# Allegro board TKA13_DEV_REVB.brd
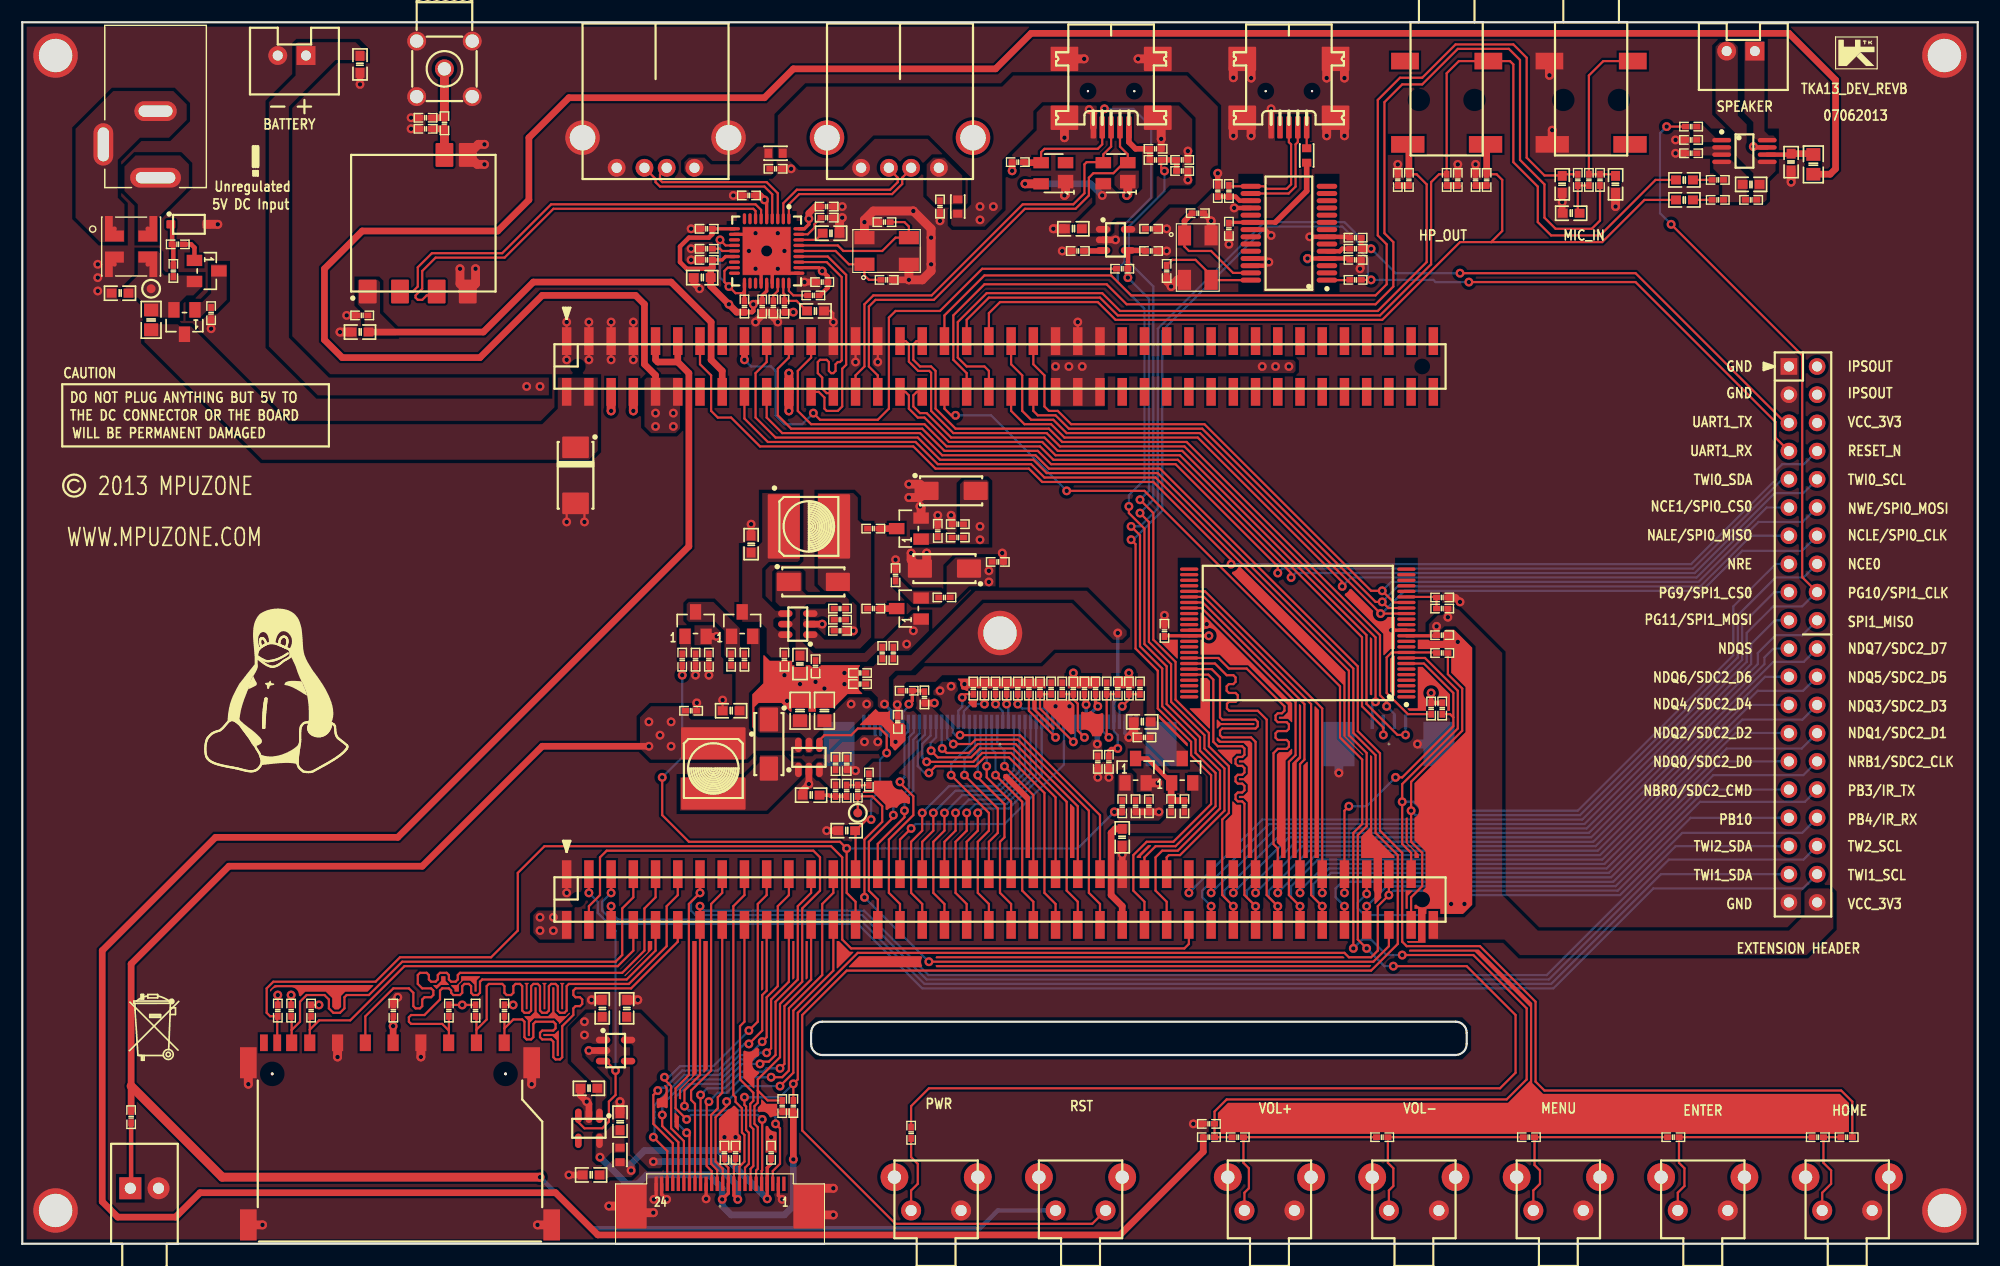
[diagram p0: board, top side]
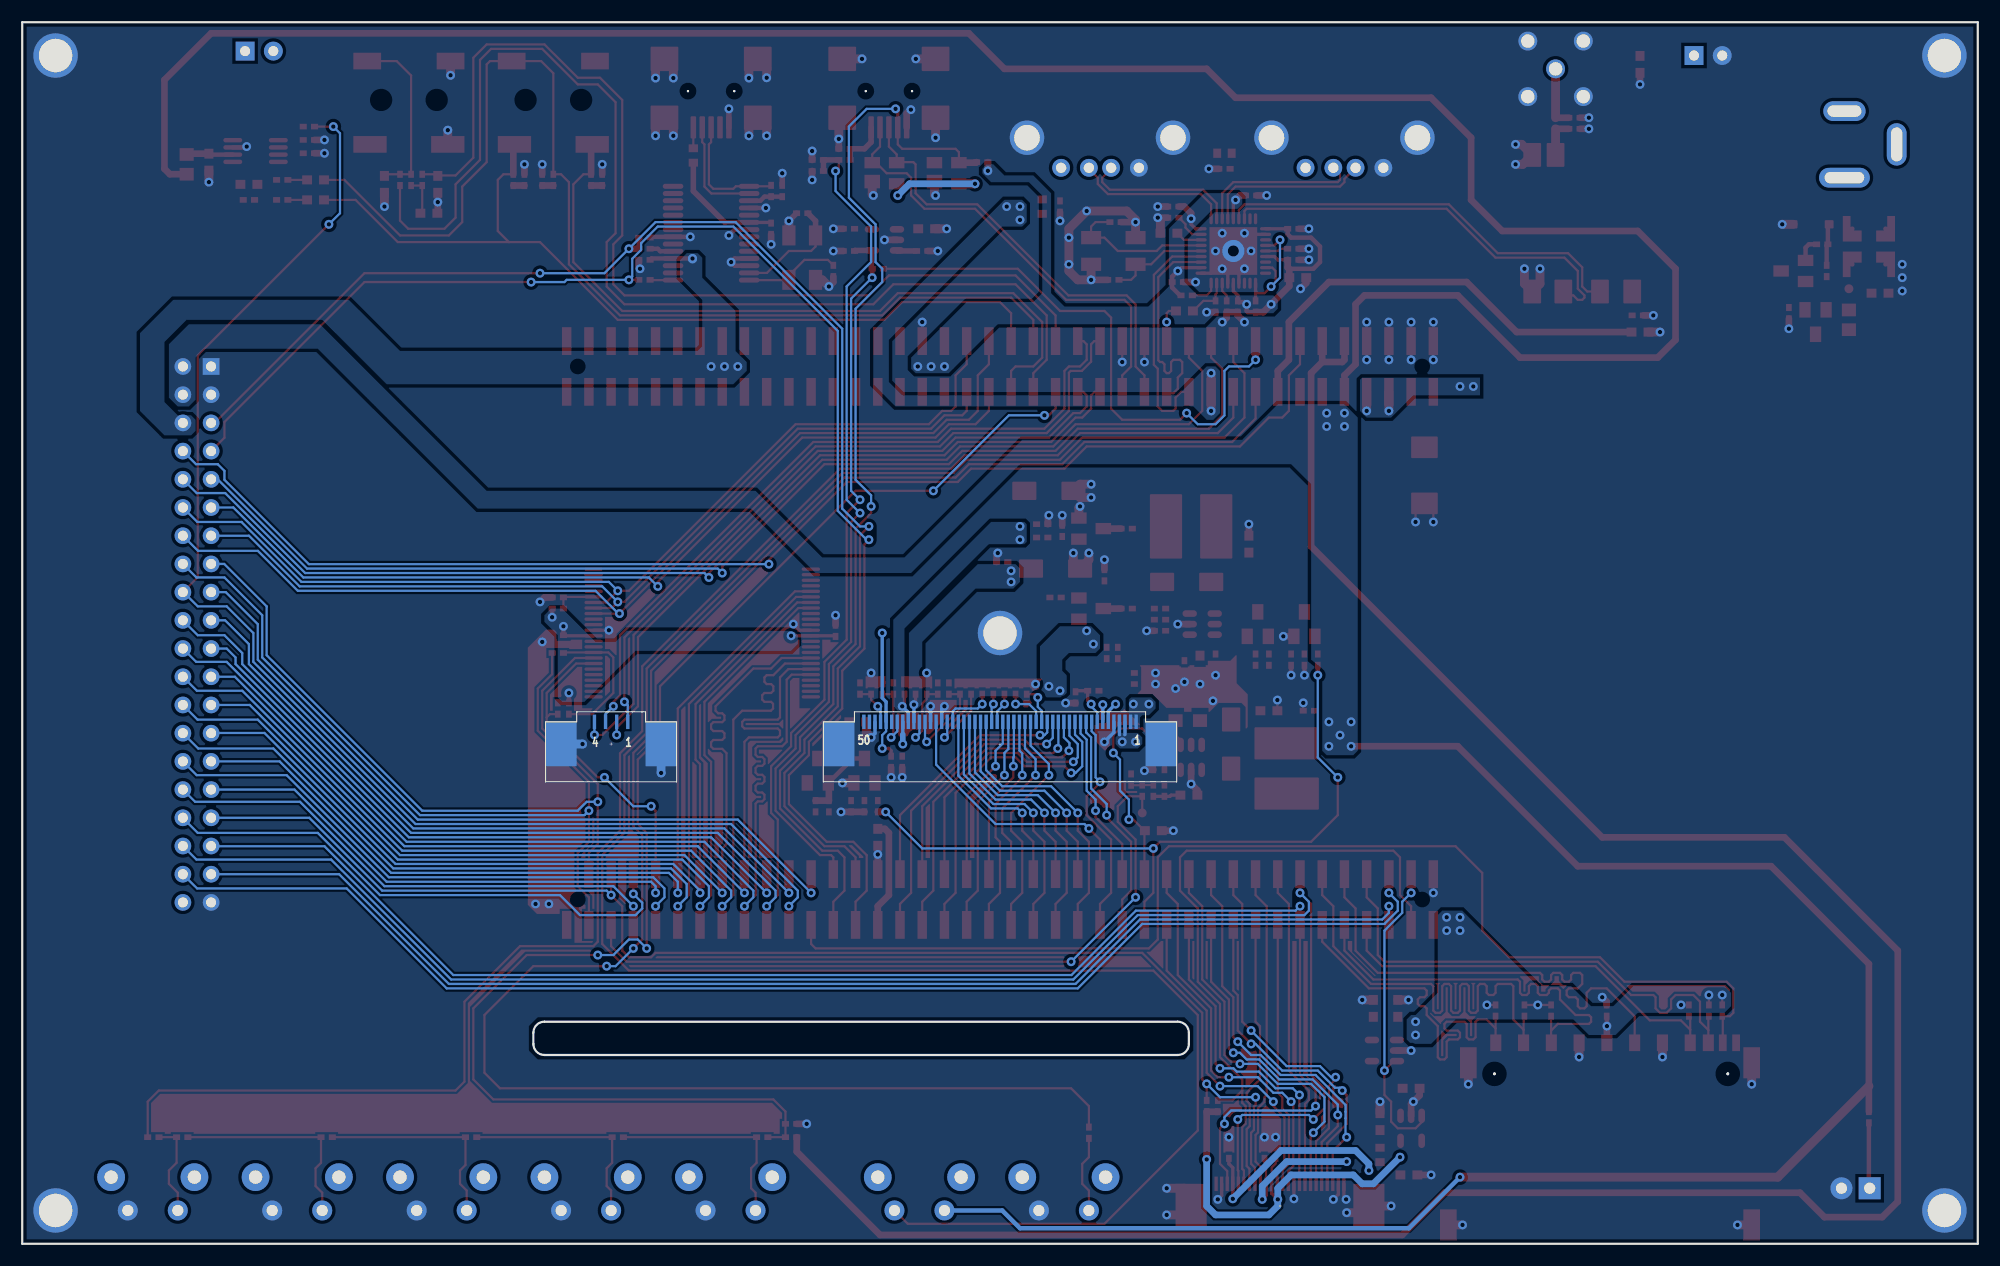
[diagram p1: board, bottom side, seen from below]

Outline 176 x 110 mm; copper layers: TOP, BOTTOM. Coordinates in mm from the lower left corner of the outline.
Outline path: 0,110 176,110 176,0 0,0 0,110 ; 71,19 arc(71.29,19.71) 72,20 129,20 arc(129.71,19.71) 130,19 130,18 arc(129.71,17.29) 129,17 72,17 arc(71.29,17.29) 71,18 71,19

## Design rules (mm)
net group BUS_NAND_NDQ: nets NDQ0/SDC2_D0 NDQ1/SDC2_D1 NDQ2/SDC2_D2 NDQ3/SDC2_D3 NDQ4/SDC2_D4 NDQ5/SDC2_D5 NDQ6/SDC2_D6 NDQ7/SDC2_D7

## Placement (name value [footprint] x y rotation side)
B1  BLM18PG121SH1  [0603_CC]  84.2 93.4 90 top
B2  BLM18PG121SH1  [0603_CC]  67.8 98.2 180 top
B3  BLM18PG121SH1  [0603_CC]  53.8 8 270 top
B4  BLM18PG121SH1  [0603_CC]  115.6 98 90 top
C1  220uF  [CAP220UF]  49.8 69.2 270 top
C2  10u  [0603]  8.8 85.6 180 top
C3  10u  [0603]  30.4 106.2 270 top
C4  10u  [0603]  61.2 87 180 top
C5  100n  [0402]  65.4 94.4 180 top
C6  100n  [0402]  61.6 91.4 180 top
C7  100n  [0402]  61.6 88.6 180 top
C8  100n  [0402]  66.6 84.4 270 top
C9  100n  [0402]  72 86.6 180 top
C10  100n  [0402]  72.4 93.4 0 top
C11  100n  [0402]  82.6 93.4 270 top
C12  4.7u  [0603]  71.4 84 0 top
C13  100n  [0402]  67.8 96.8 0 top
C14  4.7u  [0603]  72.8 91 0 top
C15  100n  [0402]  61.6 89.6 180 top
C16  33p  [0402]  77.6 92 180 top
C17  33p  [0402]  77.8 86.8 0 top
C18  100n  [0402]  102 98.6 0 top
C19  100n  [0402]  101.6 91.4 0 top
C20  10u  [0603]  94.6 91.4 180 top
C21  100n  [0402]  104.4 96.6 0 top
C22  100n  [0402]  33.4 21 90 top
C23  100n  [0402]  102.8 55.2 90 top
C24  100n  [0402]  127.8 54.8 0 top
C25  100n  [0402]  127.8 58.2 0 top
C26  10u  [0603]  63.8 48 180 top
C27  100n  [0402]  60.2 48 0 top
C28  10u (50V)  [0805]  70 48 90 top
C29  100n (50V)  [0805]  72.2 48 90 top
C30  100n  [0402]  82.4 64.2 90 top
C31  100n  [0402]  76.6 64.4 0 top
C32  100n  [0402]  96.6 50 90 top
C33  4.7u  [0603]  71 40.4 180 top
C34  100n  [0402]  78.6 60.2 90 top
C35  100n  [0402]  95.6 50 90 top
C36  100n  [0402]  76.6 57.2 0 top
C37  100n  [0402]  103.4 39.4 90 top
C38  10u  [0603]  100.8 47 180 top
C39  100n  [0402]  78.8 47 270 top
C40  100n  [0402]  63.8 52.6 90 top
C41  10u  [0603]  70 52.2 270 top
C42  100n  [0402]  96.8 43.4 270 top
C43  10u  [0603]  99 36.6 270 top
C44  10u  [0603]  65.6 63 90 top
C45  100n  [0402]  68.6 52.6 270 top
C46  DNP  [0402]  73.6 56.2 180 top
C47  100n  [0402]  100.2 39.4 270 top
C48  100n  [0402]  60.6 52.6 270 top
C49  100n  [0402]  98.6 50 90 top
C50  100n  [0402]  97.8 43.4 270 top
C51  10u  [0603]  51 14 180 top
C52  100n  [0402]  63.2 8.2 90 top
C53  10u  [0603]  53.8 11 90 top
C54  100n  [0402]  67.4 8.2 90 top
C55  10u  [0603]  51.2 6.2 180 top
C56  10u  [0603]  52.2 21.2 90 top
C57  100n  [0402]  64.2 8.2 90 top
C58  10u  [0603]  54.4 21.2 90 top
C59  100n  [0402]  123.8 95.8 90 top
C60  100n  [0402]  129.2 95.8 90 top
C61  100n  [0402]  130.8 95.8 90 top
C62  100n  [0402]  142 95.8 90 top
C63  4.7u  [0603]  138.6 95.4 270 top
C64  4.7u  [0603]  139.4 92.8 180 top
C65  3300p  [0603]  143.4 95.4 270 top
C66  1u  [0402]  150.2 98.2 180 top
C67  10u  [0603]  159.2 97.4 270 top
C68  390n  [0603]  149.6 94 0 top
C69  390n  [0603]  149.6 95.8 0 top
C70  1n  [0603]  155.6 95.4 0 top
C71  10u  [0603]  30.4 82.1 180 top
C72  100n  [0402]  30.6 83.6 180 top
C73  (DNP)  [0402]  36.3 100.4 180 top
C74  (DNP)  [0402]  36.3 101.4 180 top
C75  33p  [0402]  103 87.6 270 top
C76  33p  [0402]  105.8 92.8 0 top
C77  100n  [0402]  120 88.6 0 top
C78  100n  [0402]  107.6 94.8 90 top
C79  100n  [0402]  108.6 91.4 270 top
C80  1n  [0402]  106.8 10.8 180 top
D1  MMSZ5231BT1G  [SOD123]  15 91.8 0 top
D2  SR05  [SOT_143]  98.4 96.4 90 top
D3  SR05  [SOT_143]  92.8 96.4 90 top
D4  -  [SS14]  67.2 45 270 top
D5  BAT54S  [SOT-23]  79.8 64.4 90 top
D6  IN4736-6V8  [SS14]  83.6 67.8 0 top
D7  BAT54S  [SOT-23]  79.8 57.2 90 top
D8  IN4744-15V  [SS14]  83 60.8 180 top
D9  -  [SS14]  71.2 59.6 0 top
HL1  HOLE  [HOLE-VIA]  3 3 0 top
HL2  HOLE  [HOLE-VIA]  173 3 0 top
HL3  HOLE  [HOLE-VIA]  173 107 0 top
HL4  HOLE  [HOLE-VIA]  3 107 0 top
HL5  HOLE  [HOLE-VIA]  88 55 0 top
J1  PWR  [CONN3-PWR-PJ102A]  12 96 90 top
J2  BAT  [CON2_MOD]  23 107 0 top
J3  CON40X2  [HDR200F-SMT-2X40-FLIP]  88 31 180 top
J4  CON40X2  [HDR200F-SMT-2X40-FLIP]  88 79 180 top
J5  USB_A  [EDAC-690-004]  79 99.6 180 top
J6  USB_A  [EDAC-690-004]  57 99.6 180 top
J7  USB_MB  [HIROSE-US60-MB-5ST]  98 109.8 180 top
J8  FFC_50  [TFT_LCD_50]  88 45 180 bottom
J9  FFC_4  [TFT_LCD_RT_4]  123 45 180 bottom
J10  FFC_24  [TFT_LCD_24]  62.8 3.4 0 top
J11  HP_OUT  [AUDIO_SMD_3P]  128.2 105 270 top
J12  HP_OUT  [AUDIO_SMD_3P]  141.2 105 270 top
J13  SPK  [CON2_MOD]  153.4 107.4 0 top
J14  CON_SMA  [SMA_RIGHT_ANGLE]  38 105.8 90 top
J15  USB_MB  [HIROSE-US60-MB-5ST]  114 109.8 180 top
J16  CON40A  [HDR254M-2X20]  159 79 270 top
L1  10uH  [INDUCTOR50X50]  62.2 42.8 270 top
L2  10uH  [INDUCTOR50X50]  70.8 64.6 0 top
L3  FBMH2012HM121-T  [0805]  161.2 97.2 90 top
LED1  PWR  [LED_RIGHT_ANGLE]  11 5 0 top
NOREF  -  []  4.8 68.4 0 top
NOREF#2  -  []  163.2 105.8 0 top
NOREF#3  -  []  14.4 19.6 0 top
NOREF#4  -  []  16.4 36.4 0 top
Q1  IRLML6401  [SOT-23]  14.6 83 180 top
Q2  MBT3906DW1T1  [SOT-23]  16.6 87.6 270 top
Q3  IRLML6401  [SOT-23]  104.4 42.6 0 top
Q4  IRLML6401  [SOT-23]  64.8 55.8 0 top
Q5  MMBT3904  [SOT-23]  100.2 42.6 0 top
Q6  MMBT3904  [SOT-23]  60.6 55.8 0 top
R1  0R (DNP)  [0805]  11.6 83.2 270 top
R2  2K7  [0402]  13.6 87.6 90 top
R3  10K  [0402]  14 90 0 top
R4  470K  [0402]  17 83.8 270 top
R5  1K  [0402]  9.8 11.4 270 top
R6  10K  [0402]  71.2 85.4 180 top
R7  10K  [0402]  68.6 84.4 90 top
R8  10K  [0402]  67.6 84.4 270 top
R9  10K  [0402]  65 84.4 90 top
R10  10K  [0402]  72.4 92.4 0 top
R11  47K  [0402]  102 97.6 0 top
R12  200K  [0402]  101.6 89.4 0 top
R13  6K8  [0402]  95 89.4 180 top
R14  100K  [0402]  104.4 97.6 0 top
R15  47K  [0402]  89.6 97.4 0 top
R16  0R  [0402]  99 87.8 180 top
R17  47K  [0402]  23 21 270 top
R18  47K  [0402]  24.2 21 270 top
R19  47K  [0402]  26 21 270 top
R20  47K  [0402]  38.4 21 270 top
R21  47K  [0402]  40.8 21 270 top
R22  47K  [0402]  43.4 21 270 top
R23  10K  [0402]  126.8 48.2 90 top
R24  10K  [0402]  127.8 48.2 90 top
R25  10K  [0402]  127.8 57.2 0 top
R26  4K7  [0603]  74.2 37.2 180 top
R27  2K2  [0402]  73.2 43.2 90 top
R28  2R2 1%  [0402]  74.2 43.2 270 top
R29  1K5  [0402]  84.2 63.6 0 top
R30  47K  [0402]  84.2 64.8 180 top
R31  4K7  [0402]  76.2 41.8 270 top
R32  220R  [0402]  75.2 40.8 90 top
R33  4K7  [0402]  74.2 40.8 270 top
R34  20K  [0402]  73.2 40.8 90 top
R35  22R  [0402]  85.6 50 270 top
R36  100K  [0402]  86.6 50 270 top
R37  1K5  [0402]  83 58.2 0 top
R38  47K  [0402]  87.8 61.4 0 top
R39  100K  [0402]  87.6 50 270 top
R40  100K  [0402]  88.6 50 270 top
R41  470K  [0402]  65 52.6 90 top
R42  100K  [0402]  89.6 50 270 top
R43  100K  [0402]  90.6 50 270 top
R44  470K  [0402]  104.6 39.4 90 top
R45  4K7  [0402]  101 45.6 180 top
R46  20K  [0402]  71.4 52 270 top
R47  51K 1%  [0402]  73.6 57.2 180 top
R48  100K  [0402]  99 39.4 90 top
R49  100K  [0402]  59.4 52.6 90 top
R50  470K  [0402]  101.4 39.4 270 top
R51  470K  [0402]  61.8 52.6 270 top
R52  1K 1%  [0402]  73.6 55.2 0 top
R53  10K  [0402]  97.6 50 270 top
R54  10K (DNP)  [0402]  92.6 50 270 top
R55  10K  [0402]  93.6 50 270 top
R56  10K  [0402]  100.6 50 270 top
R57  10K (DNP)  [0402]  79.6 49.8 0 top
R58  10K  [0402]  78.4 53.2 270 top
R59  2K2  [0402]  77.4 53.2 270 top
R60  10K  [0402]  91.6 50 90 top
R61  10K (DNP)  [0402]  94.6 50 90 top
R62  10K (DNP)  [0402]  99.6 50 90 top
R63  10K  [0402]  81.2 49.2 270 top
R64  2K2  [0402]  75.4 51.4 180 top
R65  2K2  [0402]  75.4 50.4 180 top
R66  10K  [0402]  69.4 12.4 90 top
R67  10K  [0402]  68.4 12.4 90 top
R68  22R  [0402]  124.8 95.8 270 top
R69  22R  [0402]  128.2 95.8 270 top
R70  22R  [0402]  131.8 95.8 270 top
R71  2K  [0402]  140 95.8 270 top
R72  4K3  [0402]  141 95.8 90 top
R73  10K  [0402]  150.2 100.6 0 top
R74  10K (DNP)  [0402]  150.2 99.4 180 top
R75  20K  [0402]  152.6 94 0 top
R76  33K  [0402]  155.6 94 0 top
R77  20K  [0402]  152.6 95.8 0 top
R78  0R  [0402]  38 100.9 90 top
R79  22R  [0402]  120 86.8 180 top
R80  22R  [0402]  120 89.6 180 top
R81  100K  [0402]  120 90.6 180 top
R82  1K5  [0402]  108.6 94.8 90 top
R83  1K  [0402]  80 10 270 top
R84  100K  [0402]  106.8 9.6 0 top
R85  6K8  [0402]  109.4 9.6 0 top
R86  8K2  [0402]  122.4 9.6 0 top
R87  10K  [0402]  135.6 9.6 0 top
R88  11K  [0402]  148.6 9.6 0 top
R89  13K  [0402]  161.6 9.6 0 top
R90  0R  [0402]  164.2 9.6 0 top
R91  0R  [0402]  127.8 53.2 0 top
S1  PWRON  [BUTTON_RST]  80 3 0 top
S2  RESET  [BUTTON_RST]  93 3 0 top
S3  VOL+  [BUTTON_RST]  110 3 0 top
S4  VOL-  [BUTTON_RST]  123 3 0 top
S5  MENU  [BUTTON_RST]  136 3 0 top
S6  ENTER  [BUTTON_RST]  149 3 0 top
S7  HOME  [BUTTON_RST]  162 3 0 top
TP1  5V_IN  [TP80]  11.6 86 0 top
TP2  PWM  [TP80]  75.2 38.8 0 top
U1  DLW5BTN501SQ2L  [DLW5BTN501SQ2]  9.8 89.8 270 top
U2  USB2513B-AEZG  [QFN50P600X600-36V1N]  67 89.4 270 top
U3  SY6280AAC  [SOT23-5]  98.4 90.4 270 top
U4  K9F2G08U0M  [TSOP48]  114.8 55 90 top
U5  SD_SOCKET  [SDCARD_SHORT]  34 9 0 top
U6  SY7201  [SSOT23-6]  70.8 43.8 0 top
U7  AP3019KTR  [SSOT23-6]  69.8 55.8 90 top
U8  XC6219B281MR  [SOT23-5]  51 10.4 180 top
U9  XC6219B181MR  [SOT23-5]  53.4 17.4 270 top
U10  -  [LY8006UL]  155 98.4 270 top
U11  -  [BL-8188-2F]  36.1 91.9 90 top
U12  -  [PL2303HX]  114 91 90 top
Y1  24MHz  [XTAL50X320X110N_MOD]  77.8 89.4 0 top
Y2  24MHz  [XTAL50X320X110N_MOD]  105.8 88.8 270 top

## Library data of the parts
B1-B4 = BEAD
C1 = CAPACITOR POL_1: User Part Number: pn; Tolerance: RichardLC
C2-C80 = CAPACITOR_1
D1 = ZDIODE: User Part Number: pn; Tolerance: RichardLC
D2 D3 = SR05
D4 D6 D8 D9 = DIODE SCHOTTKY_1: User Part Number: pn; Tolerance: RichardLC
D5 D7 = DUALDIODE_CA_SOT23_0
HL1-HL5 = CON1: User Part Number: pn; Tolerance: RichardLC
J1 = POWER_JACK: User Part Number: X; Tolerance: X
J2 J13 = CON2_0: User Part Number: pn; Tolerance: RichardLC
J3 J4 = CONNECTOR EDGE 40X2: User Part Number: pn; Tolerance: RichardLC
J5 J6 = USB_A: User Part Number: pn; Tolerance: RichardLC
J7 J15 = CON9_2: User Part Number: pn; Tolerance: RichardLC
J8 = TFT_LCD_50
J9 = TFT_LCD_1
J10 = TFT_LCD_2
J11 J12 = PHONEJACK STEREO SW_5: User Part Number: pn; Tolerance: RichardLC
J14 = CON_SMA: User Part Number: pn; Tolerance: RichardLC
J16 = CON40A: User Part Number: pn; Tolerance: RichardLC
L1 L2 = INDUCTOR/SM_0: User Part Number: pn; Tolerance: RichardLC
L3 = PULSE-P1172-22uH-3,8A
LED1 = LED_2: User Part Number: pn; Tolerance: RichardLC
Q1 Q3 Q4 = MOSFET_P
Q2 = Q2SA1015_0
Q5 Q6 = NPN
R1-R91 = R_0
S1-S7 = SW PUSHBUTTON_1: User Part Number: pn; Tolerance: RichardLC
TP1 TP2 = TP_P0_0.8_D0: User Part Number: pn; Tolerance: RichardLC
U1 = DLW5BTN501SQ2L
U2 = USB2513B-AEZG_2
U3 = SY8008B_0: User Part Number: pn; Tolerance: RichardLC
U4 = K9F2G08U0M: User Part Number: pn; Tolerance: RichardLC
U5 = SD_SOCKET
U6 = SY7208ABC_1: User Part Number: pn; Tolerance: RichardLC
U7 = SY7208ABC_2: User Part Number: pn; Tolerance: RichardLC
U8 U9 = SY8008B_2: User Part Number: pn; Tolerance: RichardLC
U10 = SY8008B_3: User Part Number: pn; Tolerance: RichardLC
U11 = SY8008B_4: User Part Number: pn; Tolerance: RichardLC
U12 = PL2303HX: User Part Number: pn; Tolerance: RichardLC
Y1 Y2 = ZTA_0

## Footprints (pads in the part's own frame, mm; a bottom-side part is the same pattern mirrored in y, then rotated)
0402
  rect 0.635x0.508 smd: 1(-0.508,0) 2(0.508,0)
0603
  rect 0.889x0.813 smd: 1(-0.762,0) 2(0.762,0)
0603_CC
  rect 0.711x0.838 smd: 1(-0.65,0) 2(0.65,0)
0805
  rect 1.143x1.27 smd: 1(-0.889,0) 2(0.889,0)
AUDIO_SMD_3P
  round 0 hole 1.4 unplated: (2,2.5) (2,-2.5)
  rect 1.5x3 smd: 1(6,-3.5) 2(6,3.5)
  rect 1.5x2.5 smd: 3(-1.5,3.75) 4(-1.5,-3.75)
BL-8188-2F
  custom 2.15x1.6 smd: 1(-6.15,5) 2(-6.15,2.1) 3(-6.15,-1.2) 4(-6.15,-4) 5(6.15,-4) 6(6.15,-1.9)
BUTTON_RST
  round 1.8 hole 1: 1(0,0) 2(4.5,0)
  round 2.5 hole 1.2: 3(6,3) 4(-1.5,3)
CAP220UF
  custom 1.95x2.4 smd: 1(-2.525,0) 2(2.525,0)
CON2_MOD
  rect 1.7x1.7 hole 0.9: 1(2.54,0)
  round 1.7 hole 0.9: 2(0,0)
CONN3-PWR-PJ102A
  oval 1.778x4.572 hole 1.016x3.556: 1(0,0)
  oval 1.778x3.81 hole 1.016x3.048: 2(5.994,0)
  oval 3.81x1.778 hole 3.048x1.016: 3(2.997,4.699)
DLW5BTN501SQ2
  custom 2.3x1.7 smd: 1(-1.6,-1.5) 2(1.6,-1.5) 3(1.6,1.5) 4(-1.6,1.5)
EDAC-690-004
  round 1.6 hole 0.92: 1(-3.5,2.71) 2(-1,2.71) 3(1,2.71) 4(3.5,2.71)
  round 3.1 hole 2.3: S1(-6.57,0) S2(6.57,0)
HDR200F-SMT-2X40-FLIP
  round 0 hole 0.8 unplated: (-38,0) (38,0)
  rect 0.85x2.5 smd: 1(39,2.285) 2(39,-2.285) 3(37,2.285) 4(37,-2.285) 5(35,2.285) 6(35,-2.285) 7(33,2.285) 8(33,-2.285) 9(31,2.285) 10(31,-2.285) 11(29,2.285) 12(29,-2.285) 13(27,2.285) 14(27,-2.285) 15(25,2.285) 16(25,-2.285) 17(23,2.285) 18(23,-2.285) 19(21,2.285) 20(21,-2.285) 21(19,2.285) 22(19,-2.285) 23(17,2.285) 24(17,-2.285) 25(15,2.285) 26(15,-2.285) 27(13,2.285) 28(13,-2.285) 29(11,2.285) 30(11,-2.285) 31(9,2.285) 32(9,-2.285) 33(7,2.285) 34(7,-2.285) 35(5,2.285) 36(5,-2.285) 37(3,2.285) 38(3,-2.285) 39(1,2.285) 40(1,-2.285) 41(-1,2.285) 42(-1,-2.285) 43(-3,2.285) 44(-3,-2.285) 45(-5,2.285) 46(-5,-2.285) 47(-7,2.285) 48(-7,-2.285) 49(-9,2.285) 50(-9,-2.285) 51(-11,2.285) 52(-11,-2.285) 53(-13,2.285) 54(-13,-2.285) 55(-15,2.285) 56(-15,-2.285) 57(-17,2.285) 58(-17,-2.285) 59(-19,2.285) 60(-19,-2.285) 61(-21,2.285) 62(-21,-2.285) 63(-23,2.285) 64(-23,-2.285) 65(-25,2.285) 66(-25,-2.285) 67(-27,2.285) 68(-27,-2.285) 69(-29,2.285) 70(-29,-2.285) 71(-31,2.285) 72(-31,-2.285) 73(-33,2.285) 74(-33,-2.285) 75(-35,2.285) 76(-35,-2.285) 77(-37,2.285) 78(-37,-2.285) 79(-39,2.285) 80(-39,-2.285)
HDR254M-2X20
  rect 1.5x1.5 hole 0.9: 1(0,0)
  round 1.5 hole 0.9: 2(0,2.54) 3(2.54,0) 4(2.54,2.54) 5(5.08,0) 6(5.08,2.54) 7(7.62,0) 8(7.62,2.54) 9(10.16,0) 10(10.16,2.54) 11(12.7,0) 12(12.7,2.54) 13(15.24,0) 14(15.24,2.54) 15(17.78,0) 16(17.78,2.54) 17(20.32,0) 18(20.32,2.54) 19(22.86,0) 20(22.86,2.54) 21(25.4,0) 22(25.4,2.54) 23(27.94,0) 24(27.94,2.54) 25(30.48,0) 26(30.48,2.54) 27(33.02,0) 28(33.02,2.54) 29(35.56,0) 30(35.56,2.54) 31(38.1,0) 32(38.1,2.54) 33(40.64,0) 34(40.64,2.54) 35(43.18,0) 36(43.18,2.54) 37(45.72,0) 38(45.72,2.54) 39(48.26,0) 40(48.26,2.54)
HIROSE-US60-MB-5ST
  round 0.2 hole 0.9 unplated: (-2.083,6.005) (2.083,6.005)
  custom 0.5x2 smd: 1(-1.6,9.271) 2(-0.8,9.271) 3(0,9.271) 4(0.8,9.271) 5(1.6,9.271)
  custom 2.5x2.2 smd: 6(-4.2,3.1) 7(4.2,3.1) 8(-4.2,8.4) 9(4.2,8.4)
HOLE-VIA
  round 0.1 hole 0.3: (-1.35,0) (-0.955,0.955) (-0.955,-0.955) (0,1.35) (0,-1.35) (0.955,0.955) (0.955,-0.955) (1.35,0) (1.35,0)
  round 4 hole 3: 1(0,0)
INDUCTOR50X50
  custom 2.9x5.8 smd: 1(-2.26,0) 2(2.26,0)
LED_RIGHT_ANGLE
  rect 1.98x1.98 hole 1: A(-1.27,0)
  round 1.98 hole 1: C(1.27,0)
LY8006UL
  oval 0.4x1.7 smd: 1(-0.975,-2.05) 2(-0.325,-2.05) 3(0.325,-2.05) 4(0.975,-2.05) 5(0.975,2.05) 6(0.325,2.05) 7(-0.325,2.05) 8(-0.975,2.05)
PL2303HX
  oval 0.45x1.85 smd: 1(-4.225,-3.425) 2(-3.575,-3.425) 3(-2.925,-3.425) 4(-2.275,-3.425) 5(-1.625,-3.425) 6(-0.975,-3.425) 7(-0.325,-3.425) 8(0.325,-3.425) 9(0.975,-3.425) 10(1.625,-3.425) 11(2.275,-3.425) 12(2.925,-3.425) 13(3.575,-3.425) 14(4.225,-3.425) 15(4.225,3.425) 16(3.575,3.425) 17(2.925,3.425) 18(2.275,3.425) 19(1.625,3.425) 20(0.975,3.425) 21(0.325,3.425) 22(-0.325,3.425) 23(-0.975,3.425) 24(-1.625,3.425) 25(-2.275,3.425) 26(-2.925,3.425) 27(-3.575,3.425) 28(-4.225,3.425)
QFN50P600X600-36V1N
  oval 1x0.3 smd: 1(-2.9,2) 2(-2.9,1.5) 3(-2.9,1) 4(-2.9,0.5) 5(-2.9,0) 6(-2.9,-0.5) 7(-2.9,-1) 8(-2.9,-1.5) 9(-2.9,-2) 19(2.9,-2) 20(2.9,-1.5) 21(2.9,-1) 22(2.9,-0.5) 23(2.9,0) 24(2.9,0.5) 25(2.9,1) 26(2.9,1.5) 27(2.9,2)
  oval 0.3x1 smd: 10(-2,-2.9) 11(-1.5,-2.9) 12(-1,-2.9) 13(-0.5,-2.9) 14(0,-2.9) 15(0.5,-2.9) 16(1,-2.9) 17(1.5,-2.9) 18(2,-2.9) 28(2,2.9) 29(1.5,2.9) 30(1,2.9) 31(0.5,2.9) 32(0,2.9) 33(-0.5,2.9) 34(-1,2.9) 35(-1.5,2.9) 36(-2,2.9)
  rect 4.3x4.3 smd: 37(0,0)
SDCARD_SHORT
  round 0.254 hole 1.6 unplated: (-11.5,6.3) (9.5,6.3)
  rect 1x1.5 smd: 1(6.88,9.1) 2(4.38,9.1) 3(1.88,9.1) 4(-0.62,9.1) 5(-3.12,9.1) 6(-5.62,9.1) 7(-8.12,9.1) 8(-9.75,9.1) 9(9.38,9.1)
  rect 0.7x1.5 smd: 10(-11.05,9.1) 11(-12.25,9.1)
  rect 1.5x2.8 smd: 12(-13.65,7.3) 13(11.85,7.3) 14(13.65,-7.3) 15(-13.65,-7.3)
SMA_RIGHT_ANGLE
  round 1.7 hole 1.2: 1(0,0) SH1(-2.5,-2.5) SH2(2.5,-2.5) SH3(2.5,2.5) SH4(-2.5,2.5)
SOD123
  custom 0.8x0.75 smd: A(1.625,0) C(-1.625,0)
SOT23-5
  oval 0.6x1.3 smd: 1(-0.95,-1.125) 2(0,-1.125) 3(0.95,-1.125) 4(0.95,1.125) 5(-0.95,1.125)
SOT-23
  rect 1.016x1.397 smd: 1(-0.95,-1.1) 2(0.95,-1.1) 3(0,1.1)
SOT_143
  rect 1.219x1.397 smd: 1(-0.75,-1.1)
  rect 1.016x1.397 smd: 2(0.95,-1.1) 3(0.95,1.1) 4(-0.95,1.1)
SS14
  custom 2.17x1.65 smd: A(2.21,0) C(-2.21,0)
SSOT23-6
  oval 0.6x1.3 smd: 1(-0.95,-1.125) 2(0,-1.125) 3(0.95,-1.125) 4(0.95,1.125) 5(0,1.125) 6(-0.95,1.125)
TFT_LCD_24
  rect 0.3x1.3 smd: 1(5.75,2) 2(5.25,2) 3(4.75,2) 4(4.25,2) 5(3.75,2) 6(3.25,2) 7(2.75,2) 8(2.25,2) 9(1.75,2) 10(1.25,2) 11(0.75,2) 12(0.25,2) 13(-0.25,2) 14(-0.75,2) 15(-1.25,2) 16(-1.75,2) 17(-2.25,2) 18(-2.75,2) 19(-3.25,2) 20(-3.75,2) 21(-4.25,2) 22(-4.75,2) 23(-5.25,2) 24(-5.75,2)
  rect 2.8x4 smd: M1(8,0) M2(-8,0)
TFT_LCD_50
  rect 0.3x1.3 smd: 1(12.25,2) 2(11.75,2) 3(11.25,2) 4(10.75,2) 5(10.25,2) 6(9.75,2) 7(9.25,2) 8(8.75,2) 9(8.25,2) 10(7.75,2) 11(7.25,2) 12(6.75,2) 13(6.25,2) 14(5.75,2) 15(5.25,2) 16(4.75,2) 17(4.25,2) 18(3.75,2) 19(3.25,2) 20(2.75,2) 21(2.25,2) 22(1.75,2) 23(1.25,2) 24(0.75,2) 25(0.25,2) 26(-0.25,2) 27(-0.75,2) 28(-1.25,2) 29(-1.75,2) 30(-2.25,2) 31(-2.75,2) 32(-3.25,2) 33(-3.75,2) 34(-4.25,2) 35(-4.75,2) 36(-5.25,2) 37(-5.75,2) 38(-6.25,2) 39(-6.75,2) 40(-7.25,2) 41(-7.75,2) 42(-8.25,2) 43(-8.75,2) 44(-9.25,2) 45(-9.75,2) 46(-10.25,2) 47(-10.75,2) 48(-11.25,2) 49(-11.75,2) 50(-12.25,2)
  rect 2.8x4 smd: M1(14.5,0) M2(-14.5,0)
TFT_LCD_RT_4
  rect 0.3x1.3 smd: 1(1.5,2) 2(0.5,2) 3(-0.5,2) 4(-1.5,2)
  rect 2.8x4 smd: M1(4.5,0) M2(-4.5,0)
TP80
  round 0.8 smd: 1(0,0)
TSOP48
  oval 0.3x1.65 smd: 1(-5.75,-9.775) 2(-5.25,-9.775) 3(-4.75,-9.775) 4(-4.25,-9.775) 5(-3.75,-9.775) 6(-3.25,-9.775) 7(-2.75,-9.775) 8(-2.25,-9.775) 9(-1.75,-9.775) 10(-1.25,-9.775) 11(-0.75,-9.775) 12(-0.25,-9.775) 13(0.25,-9.775) 14(0.75,-9.775) 15(1.25,-9.775) 16(1.75,-9.775) 17(2.25,-9.775) 18(2.75,-9.775) 19(3.25,-9.775) 20(3.75,-9.775) 21(4.25,-9.775) 22(4.75,-9.775) 23(5.25,-9.775) 24(5.75,-9.775) 25(5.75,9.775) 26(5.25,9.775) 27(4.75,9.775) 28(4.25,9.775) 29(3.75,9.775) 30(3.25,9.775) 31(2.75,9.775) 32(2.25,9.775) 33(1.75,9.775) 34(1.25,9.775) 35(0.75,9.775) 36(0.25,9.775) 37(-0.25,9.775) 38(-0.75,9.775) 39(-1.25,9.775) 40(-1.75,9.775) 41(-2.25,9.775) 42(-2.75,9.775) 43(-3.25,9.775) 44(-3.75,9.775) 45(-4.25,9.775) 46(-4.75,9.775) 47(-5.25,9.775) 48(-5.75,9.775)
XTAL50X320X110N_MOD
  rect 1.803x1.194 smd: 1(-2,-1.2) 2(2,-1.2) 3(2,1.2) 4(-2,1.2)

## Nets
5V_IN: C2.1 Q1.2(SOURCE) Q2.2(E) R1.1 R2.1 TP1.1 U1.3
AVCC_3V: J4.10 J4.12 R84.1
GND: C1.2 C2.2 C3.2 C4.2 C5.2 C6.2 C7.2 C8.2 C9.2 C10.2 C11.2 C12.2 C13.2 C14.2 C15.2 C16.2 C17.2 C18.2 C19.2 C20.2 C21.2 C22.2 C23.2 C24.2 C25.2 C26.2 C27.2 C28.2 C29.2 C30.2 C32.2 C33.2 C34.2 C35.2 C38.2 C39.2 C41.2 C42.2 C43.2 C44.2 C45.2 C47.2 C48.2 C49.2 C50.2 C51.2 C52.2 C53.2 C54.2 C55.2 C56.2 C57.2 C58.2 C59.2 C60.2 C61.2 C63.2 C64.2 C65.2 C66.2 C67.2 C71.2 C72.2 C73.2 C74.2 C75.2 C76.2 C77.2 C78.2 C79.2 C80.2 D1.A(ANODE) D2.1 D3.1 D5.2(CATHODE2) D6.C D8.A HL1.1 HL2.1 HL3.1 HL4.1 HL5.1 J2.2 J3.2 J3.52 J3.80 J4.2 J4.4 J4.6 J4.8 J4.26 J4.28 J4.30 J4.46 J4.48 J4.50 J5.4(GND) J5.S1 J5.S2 J6.4(GND) J6.S1 J6.S2 J7.5(GND) J7.6(SH1) J7.7(SH2) J7.8(SH3) J7.9(SH4) J8.5(GND1) J8.36(GND2) J8.38(GND3) J8.48(GND4) J8.M1 J8.M2 J9.M1 J9.M2 J10.2(AGND) J10.15(DGND) J10.23(NC1) J10.24(NC2) J10.M1 J10.M2 J12.1 J12.4 J14.SH1 J14.SH2 J14.SH3 J14.SH4 J15.5(GND) J15.6(SH1) J15.7(SH2) J15.8(SH3) J15.9(SH4) J16.1 J16.3 J16.39 LED1.C Q5.2(EMITTER) Q6.2(EMITTER) R4.2 R8.2 R10.2 R12.2 R13.2 R14.2 R26.2 R28.2 R30.2 R35.1 R36.1 R38.2 R39.1 R40.1 R42.1 R43.1 R45.2 R46.2 R50.2 R51.2 R52.2 R60.2 R61.2 R62.2 R63.2 R64.2 R65.2 R74.2 R81.2 S1.2 S3.2 S4.2 S5.2 S6.2 S7.2 U1.2 U2.11(TEST) U2.22(NON_REM1) U2.24(SCL) U2.28(NOM_REM0) U2.37(EPAD) U3.2(GND) U4.13(VSS1) U4.36(VSS2) U5.3(VSS1) U5.6(VSS2) U5.12(SH1) U5.13(SH2) U5.14(SH3) U5.15(SH4) U6.2(GND) U7.2(GND) U8.2(GND) U9.2(GND) U10.7(GND) U11.4(GND1) U11.5(GND2) U12.7(GND1) U12.18(GND_3V3) U12.21(GND2) U12.25(GND_PLL) U12.26(PLL_TEST) Y1.2 Y1.4 Y2.2 Y2.4
VBUS_OTG: C18.1 C20.1 D2.4 D3.4 J7.1(VBUS) R11.1 U3.1(OUT)
VCC_3V3_1: C22.1 C51.1 C56.1 J3.1 R17.1 R18.1 R19.1 R20.1 R21.1 R22.1 U5.4(VDD) U8.1(VIN) U9.1(VIN)
VCC_3V3_2: C37.1 C43.1 J3.51 Q3.2(SOURCE) R44.1
VCC_3V3_3: C23.1 C24.1 J3.79 J16.40 R23.2 R24.2 R25.2 U4.12(VCC1) U4.37(VCC2)
VCC_3V3_4: C4.1 C5.1 C6.1 C7.1 C8.1 C9.1 C10.1 C77.1 J4.45 J4.47 J4.49 J16.6 R6.1 R7.1 R9.1 R15.1 U2.5(VDD33_1) U2.10(VDD33_2) U2.15(VDD33_3) U2.23(VDD33_4) U2.29(VDD33_5) U2.36(VDD33_6) U12.4(VDD_232)
ACIN_5V: C1.1 J4.1 J4.3 Q1.3(DRAIN) R1.2
BAT: C3.1 J2.1 J4.5 J4.7
CSI_AVDD: B3.2 C54.1 C55.1 J10.4(AVDD)
CSI_D0: J3.20 J10.19(D0)
CSI_D1: J3.19 J10.21(D1)
CSI_D2: J3.22 J10.22(D2)
CSI_D3: J3.21 J10.20(D3)
CSI_D4: J3.24 J10.18(D4)
CSI_D5: J3.23 J10.16(D5)
CSI_D6: J3.26 J10.14(D6)
CSI_D7: J3.25 J10.12(D7)
CSI_DVDD: C57.1 C58.1 J10.10(DVDD) U9.5(OUT)
CSI_HSYNC: J3.18 J10.9(HREF)
CSI_IOVDD: B3.1 C52.1 C53.1 J10.11(DOVDD) R66.1 R67.1 U8.5(OUT)
CSI_MCLK: J3.15 J10.13(XCLK)
CSI_PCLK: J3.16 J10.17(PCLK)
CSI_PWR_EN: J3.4 U8.3(CE) U9.3(CE)
CSI_RST: J3.3 J10.6(R\S\T\N\) R67.2
CSI_VSYNC: J3.17 J10.7(VSYNC)
DITHB: J8.47(DITHB) R56.2 R62.1
EXTEN: J4.16
H_DM1: J5.2(D-) U2.1(BDM_DN1)
H_DM2: J6.2(D-) U2.3(BDM_DN2)
H_DM3: U2.6(BDM_DN3) U11.2(DM)
H_DP1: J5.3(D+) U2.2(BDP_DN1)
H_DP2: J6.3(D+) U2.4(BDP_DN2)
H_DP3: U2.7(BDP_DN3) U11.3(DP)
HPCOM: J4.39 J11.1 R68.1
HPOUTL: C68.1 J4.40 J11.2 R70.1
HPOUTR: C69.1 J4.38 J11.3 R69.1
IPSOUT: C26.1 C27.1 C40.1 J4.9 J4.11 J16.2 J16.4 L1.1 L3.1 Q4.2(SOURCE) R5.1 R41.1 S2.1 U6.6(VDD)
L/R: J8.39(L/R) R54.2 R60.1
LCD_AVDD: C41.1 C42.1 C46.1 D7.1(CATHODE1) D9.C J8.43(AVDD) R46.1 R47.1 R58.1 R59.1 U7.5(OVR)
LCD_BL_EN: J3.28 R26.1 U6.4(EN)
LCD_CLK: J3.32 J8.37(DCLK)
LCD_D2: J3.50 J8.17(B2)
LCD_D3: J3.49 J8.16(B3)
LCD_D4: J3.48 J8.15(B4)
LCD_D5: J3.47 J8.14(B5)
LCD_D6: J3.46 J8.13(B6)
LCD_D7: J3.45 J8.12(B7)
LCD_D10: J3.44 J8.25(G2)
LCD_D11: J3.43 J8.24(G3)
LCD_D12: J3.42 J8.23(G4)
LCD_D13: J3.41 J8.22(G5)
LCD_D14: J3.40 J8.21(G6)
LCD_D15: J3.39 J8.20(G7)
LCD_D18: J3.38 J8.33(R2)
LCD_D19: J3.37 J8.32(R3)
LCD_D20: J3.36 J8.31(R4)
LCD_D21: J3.35 J8.30(R5)
LCD_D22: J3.34 J8.29(R6)
LCD_D23: J3.33 J8.28(R7)
LCD_DE: J3.31 J8.9(DE)
LCD_HSYNC: J3.30 J8.11(HS)
LCD_PWR: J3.27 R48.1 R49.1
LCD_RST: C49.1 J8.44(RESET) R53.2
LCD_VCC: C38.1 C39.1 J8.7(DVDD) Q3.3(DRAIN) R31.1 R45.1 R53.1 R54.1 R55.1 R56.1 R57.1
LCD_VSYNC: J3.29 J8.10(VS)
LRADC: C80.1 J4.35 R84.2 R85.1
MICIN1: C62.1 J4.37
MODE: J8.8(MODE) R57.2 R63.1
N_VBUSEN: J4.18 R16.2
NALE/SPI0_MISO: J4.43 J16.13 U4.17(A\L\E\)
NCE0: J3.77 J16.16 R91.2
NCE1/SPI0_CS0: J4.41 J16.11
NCLE/SPI0_CLK: J4.42 J16.14 U4.16(C\L\E\)
NDQ0/SDC2_D0: J3.70 J16.29 U4.29(I/O0)
NDQ1/SDC2_D1: J3.69 J16.28 U4.30(I/O1)
NDQ2/SDC2_D2: J3.68 J16.27 U4.31(I/O2)
NDQ3/SDC2_D3: J3.67 J16.26 U4.32(I/O3)
NDQ4/SDC2_D4: J3.66 J16.25 U4.41(I/O4)
NDQ5/SDC2_D5: J3.65 J16.24 U4.42(I/O5)
NDQ6/SDC2_D6: J3.64 J16.23 U4.43(I/O6)
NDQ7/SDC2_D7: J3.63 J16.22 U4.44(I/O7)
NDQS: J3.62 J16.21
NRB0/SDC2_CMD: J3.72 J16.31 R24.1 U4.7(R/B\1\)
NRB1/SDC2_CLK: J3.71 J16.30
NRE: J3.78 J16.15 U4.8(R\E\)
NWE/SPI0_MOSI: J4.44 J16.12 U4.18(W\E\)
PA_SHDN: R73.2 R74.1 U10.1(S\H\D\N\)
PB2/PWM: J3.75 R32.1 TP2.1
PB3/IR_TX: J3.73 J16.32
PB4/IR_RX: J3.74 J16.34
PB10: J3.76 J10.8(PWDN) J16.33 R66.2
PG0: J3.57 R17.2 U5.10(CD)
PG1: C21.1 J3.56 R11.2 R14.1
PG2: D3.3 J3.55 J7.4(ID) R15.2
PG3/UART1_TX: J3.54 J16.5 R80.1 R81.1
PG4/UART1_RX: J3.53 J16.7 R79.1
PG9/SPI1_CS0: J3.58 J16.17
PG10/SPI1_CLK: J3.59 J16.18 R73.1
PG11/SPI1_MOSI: J3.60 J16.19
PG12/SPI1_MISO: J3.61 J16.20 R12.1 R16.1 U3.4(EN)
PMIC_VBUS: J4.13
PWRON: J4.17 R83.1
RESET_N: J4.14 J16.8
RST_BT: J4.20 S2.2
SDC0_CLK: J3.10 U5.5(CLK)
SDC0_CMD: J3.9 R20.2 U5.2(CMD)
SDC0_D0: J3.7 R19.2 U5.7(DAT0)
SDC0_D1: J3.8 R18.2 U5.8(DAT1)
SDC0_D2: J3.11 R22.2 U5.9(DAT2)
SDC0_D3: J3.12 R21.2 U5.1(CD/DAT3)
TPX1: J4.32 J9.1
TPX2: J4.34 J9.3
TPY1: J4.31 J9.2
TPY2: J4.33 J9.4
TWI0_SCL: J4.24 J16.10
TWI0_SDA: J4.22 J16.9
TWI1_SCL: J3.6 J16.38
TWI1_SDA: J3.5 J16.37
TWI2_SCL: J3.14 J10.5(SIO_C) J16.36
TWI2_SDA: J3.13 J10.3(SIO_D) J16.35
U/D: J8.40(U/D) R55.2 R61.1
UBOOT: J4.19 R90.2
UDM0: D2.2 J4.29 J7.2(DM)
UDM1: J4.25 U2.30(USBDM_UP)
UDP0: D2.3 J4.27 J7.3(DP)
UDP1: J4.23 U2.31(USBDP_UP)
VCOM: C50.1 J8.6(VCOM1) J8.46(VCOM2) R58.2 R59.2 R64.1 R65.1
VGH: C35.1 D8.C J8.41(VGH) R37.2 R38.1
VGL: C32.1 D6.A J8.42(VGL) R29.2 R30.1
VLED+: C28.1 C29.1 D4.C J8.1(VLED1+) J8.2(VLED2+) U6.5(OVP)
VLED-: J8.3(VLED1-) J8.4(VLED2-) R27.2 R28.1
VMIC: C63.1 J4.36 R71.1
VUSB_5V: B1.1 B2.1 C19.1 J4.21 U3.5(IN)
WIFI_3V3: C71.1 C72.1 J4.15 U11.1(VDD33)
N15075815: J1.2(RING) J1.3(SW) U1.1
N15077026: D1.C(CATHODE) R2.2 R3.1
N15077212: Q2.1(B) R3.2
N15077502: Q1.1(GATE) Q2.3(C) R4.1
N15079007: C16.1 U2.33(XTALIN_CLK) Y1.3
N15079011: C17.1 U2.32(XTALOUT) Y1.1
N15079527: R6.2 U2.27(VBUS_DET)
N15079554: R9.2 U2.13(OCS_N1) U2.17(OCS_N2) U2.19(OCS_N3)
N15079929: R10.1 U2.35(RBIAS)
N15080001: C15.1 U2.14(CRFILT)
N15080129: C14.1 U2.34(PLLFILT)
N15080405: R8.1 U2.25(HS_IND/CFG)
N15080887: C12.1 R7.2 U2.26(RESET_N)
N15081824: B1.2 C11.1 J5.1(VBUS)
N15082380: B2.2 C13.1 J6.1(VBUS)
N15083958: R13.1 U3.3(ISET)
N15097873: R23.1 R91.1 U4.9(C\E\1\)
N15097973: C25.1 R25.1 U4.19(W\P\)
N15103721: D4.A L1.2 U6.1(LX)
N15104087: R27.1 R34.2 U6.3(FB)
N15104307: C33.1 R33.2 R34.1
N15104514: R31.2 R32.2 R33.1
N15104883: C37.2 Q3.1(GATE) Q5.3(COLLECTOR) R44.2
N15105164: C47.1 Q5.1(BASE) R48.2 R50.1
N15106124: C31.1 C36.1 D9.A L2.2 U7.1(LX)
N15106143: C44.1 C45.1 L2.1 Q4.3(DRAIN) U7.4(EN) U7.6(VDD)
N15107249: C40.2 Q4.1(GATE) Q6.3(COLLECTOR) R41.2
N15107375: C48.1 Q6.1(BASE) R49.2 R51.1
N15108318: C46.2 R47.2 R52.1 U7.3(FB)
N15109703: C36.2 D7.3(ANODES)
N15109934: C34.1 D7.2(CATHODE2) R37.1
N15111016: C31.2 D5.3(ANODES)
N15111239: C30.1 D5.1(CATHODE1) R29.1
N15119862: J8.18(B1) R35.2
N15119866: J8.19(B0) R36.2
N15119870: J8.26(G1) R39.2
N15119874: J8.27(G0) R40.2
N15119878: J8.34(R1) R42.2
N15119882: J8.35(R0) R43.2
N15137862: C64.1 R71.2 R72.1
N15137938: C62.2 C65.1 J12.3 R72.2
N15139101: C66.1 U10.2(BYBASS) U10.3(NC)
N15139535: C68.2 R75.1
N15139569: C69.2 R77.1
N15139656: C70.2 J13.2 R76.2 U10.5(VO1)
N15139750: C70.1 R75.2 R76.1 R77.2 U10.4(IN-)
N15140246: C67.1 L3.2 U10.6(VDD)
N15140596: J13.1 U10.8(VO2)
N15141836: C73.1 R78.1 U11.6(ANT)
N15141979: C74.1 J14.1 R78.2
N15147888: J15.2(DM) U12.16(DM)
N15147892: J15.3(DP) R82.2 U12.15(DP)
N15147996: C75.1 U12.28(OSC2) Y2.3
N15148112: C78.1 R82.1 U12.17(VDD_3V3)
N15148158: B4.1 C79.1 U12.20(VDD2)
N15148186: C76.1 U12.27(OSC1) Y2.1
N15150361: B4.2 J15.1(VBUS)
N15150440: R79.2 U12.1(TXD)
N15150662: R80.2 U12.5(RXD)
N15151600: R83.2 S1.1
N15151855: R85.2 R86.1 S3.1
N15152227: R86.2 R87.1 S4.1
N15152474: R87.2 R88.1 S5.1
N15152672: R88.2 R89.1 S6.1
N15152990: R89.2 R90.1 S7.1
N150756660: J1.1(TIP) U1.4
N151374260: C59.1 R68.2
N151375131: C60.1 R69.2
N151375431: C61.1 R70.2
N151512250: LED1.A R5.2

Pads without a net: D3 2; J4 51 52 53 54 55 56 57 58 59 60 61 62 63 64 65 66 67 68 69 70 71 72 73 74 75 76 77 78 79 80; J8 45 49 50; J10 1; J11 4; J12 2; J15 4; S1 3 4; S2 3 4; S3 3 4; S4 3 4; S5 3 4; S6 3 4; S7 3 4; U2 8 9 12 16 18 20 21; U4 1 2 3 4 5 6 10 11 14 15 20 21 22 23 24 25 26 27 28 33 34 35 38 39 40 45 46 47 48; U5 11; U8 4; U9 4; U12 2 3 6 8 9 10 11 12 13 14 19 22 23 24

## Via types
v1: diameter 0.8, hole 0.4, TOP to BOTTOM, 372 vias
v2: diameter 2, hole 1, TOP to BOTTOM, 1 via

## Routing (per net, layer and track width the routed paths; a pad name or vN(x,y) marks a point on that pad's centre or on a via; arc(x,y) is an arc through that point)
AVCC_3V: length 219.7
  TOP w0.6: 59,79.4 J4.12 ; 59,79.4 57.2,79.4 57,79.6 J4.10 ; 59,79.4 60,78.4 60,62.8 33.8,36.6 17.4,36.6 7.2,26.4 7.2,3.8 8.6,2.4 13.8,2.4 16,4.6 48,4.6 51.8,0.8 98.8,0.8 106.29,8.29 R84.1
GND: length 258.1
  TOP w0.2: v1(49,65) 49,65.88 C1.2 50.6,65.88 v1(50.6,65) ; v1(51,83) J4.4 v1(51,79.6) ; C12.2 72.8,84 73,83.8 v1(73,83) J4.26 ; v1(55,79.6) J4.8 v1(55,83) ; v1(53,79.6) J4.6 v1(53,83) ; 49,33.28 v1(49,31.6) ; v1(49,79.6) J4.2 v1(49,83) ; J4.30 v1(77,79.4) ; J4.28 v1(75,79.4) ; J3.80 127,32.2 v1(128.6,30.6) v1(129.8,30.6) ; C26.2 v1(63.04,48.96) ; C27.2 v1(60.71,48.71) ; J4.48 v1(95,83)
  TOP w0.3: v1(56.85,4) 57.05,4.2 J10.24 ; v1(66,87.8) 66.5,87.3 U2.22 ; U2.11 65.9,90.9 v1(66,91) ; v1(106.6,55.8) 106.05,55.25 U4.36 ; U4.13 v1(123.2,55.25) ; U2.28 69,87.4 68.6,87.8 v1(68,87.8) 67.5,87.3 U2.24 ; J10.15 v1(61.55,4.05) ; J10.2 68.05,4.35 v1(68.4,4) ; J10.23 57.55,4.45 v1(58,4)
  TOP w0.4: v1(78.6,45.2) 78.6,46 78.8,46.2 C39.2 ; v1(112.4,90.8) 111.88,91.33 U12.21 ; 157.05,98.72 155.88,98.72 v1(155.8,98.8) ; R81.2 119.42,90.67 U12.7 v1(115.88,90.67) ; R51.2 v1(61.8,51.2) ; U12.18 v1(109.08,93.28) ; C48.2 v1(60.6,51.2) ; U12.26 111.88,88.08 v1(112.2,88.4) 111.88,88.72 U12.25
  TOP w0.5: C78.2 v1(107.6,96.4) ; v1(75.8,92) 75.8,91.8 ; v1(107,92.11) C76.2 ; J15.5 v1(112.4,102.2)
  TOP w0.6: U3.2 v1(98.4,90.4) ; R28.2 74.91,42.69 v1(75,42.6) ; C45.2 v1(68.6,51.2) ; C66.2 v1(148.8,98.2) ; C59.2 v1(123.8,97.2) ; R45.2 v1(99.6,45.6) ; R65.2 v1(74,50.4) ; R26.2 v1(72.4,37.2) ; C51.2 50.24,13.36 v1(50.8,12.8) 51,12.6 U8.2 ; C10.2 v1(73.8,93.4) ; v1(129.4,57.8) 129,58.2 C25.2 ; C23.2 v1(102.8,56.6) ; U6.2 v1(70.8,41.4) 70.24,40.84 C33.2 ; C6.2 v1(60.2,91.4) ; C64.2 138.6,92.84 v1(138.6,93.8) C63.2 ; C21.2 v1(104.91,95.8) ; R74.2 v1(148.8,99.4) ; R14.2 v1(104.91,98.4) ; C47.2 R50.2 v1(102.31,38.89) ; C22.2 33.4,21.8 v1(33.8,22.2) ; C49.2 R62.2 v1(99.6,51.4) ; 75.8,91.8 76,92 C16.2 ; Q6.2 v1(62.5,54.7) ; C4.2 60.44,86.52 v1(60.95,86) ; R12.2 v1(103,89.4) ; C19.2 v1(103,91.4) ; C77.2 120.51,87.91 v1(120.4,87.8) ; R10.2 v1(73.8,92.4) ; C54.2 v1(67.4,9.6) ; J3.52 v1(99,35.06) C43.2 ; C34.2 v1(78.6,61.6) ; v1(129.2,54.2) 128.6,54.8 C24.2 ; C60.2 v1(129.2,97.2) ; R38.2 88.31,62.09 v1(88.2,62.2) ; v1(66,83) 66.6,83.6 C8.2 R8.2 67.6,83.4 v1(68,83) ; C3.2 v1(30.4,104.4) ; C18.2 v1(102.51,99.49) ; C73.2 v1(35,100.4) ; U7.2 v1(72,55.8) ; C44.2 v1(65.6,64.8) ; v1(94.6,51.4) R61.2 C35.2 C32.2 ; R30.2 83.69,65.51 v1(83.6,65.6) ; C52.2 v1(63.2,9.6) ; C13.2 v1(69.2,96.8) ; R64.2 v1(74,51.4) ; C80.2 v1(105.4,10.8) ; R46.2 v1(71.4,50.6) ; C9.2 v1(70.4,86.6) ; C79.2 v1(108.6,90) ; J7.5 96.4,101.8 96.07,102.13 v1(96.02,102.13) ; C72.2 v1(29.2,83.6) ; C50.2 v1(97.8,42) ; C74.2 v1(35,101.4) ; v1(79.8,86.8) C17.2 ; C61.2 v1(130.8,97.2) ; C30.2 v1(82.4,65.6) ; C7.2 v1(60.2,88.6) ; R52.2 v1(74.8,55.2) ; v1(82.09,48.69) R63.2 ; v1(103.4,86.2) 103,86.6 C75.2 ; U9.2 v1(51,17.4) ; C42.2 v1(96.8,42) ; R4.2 v1(17,82.4) ; C15.2 v1(60.2,89.6) ; C55.2 v1(49.2,6.2) ; C57.2 v1(64.2,9.6) ; R13.2 v1(93.6,89.4) ; C11.2 v1(82.6,92.11) ; C5.2 v1(64,94.4)
  TOP w0.8: v1(73,5) 71.4,5 70.8,4.4 J10.M1 70.8,2.8 71,2.6 v1(73,2.6) ; v1(117.4,99.77) 117.4,100.6 J15.8 119,100.6 v1(119,99.77) ; D3.1 93.9,94.5 v1(93.8,94.4) ; J7.6 v1(100.42,106.7) ; v1(117.4,104.97) 117.4,105.9 J15.6 119,105.9 v1(119,104.97) ; J12.4 v1(137.45,105.22) ; J7.7 v1(95.58,106.7) ; v1(102.51,99.49) 102.51,101.09 J7.8 ; U5.12 v1(20.35,14.37) ; v1(80,62.2) 80,61.59 D8.A 81.4,61.41 v1(81.4,62.2) ; v1(75.8,92) 75.8,92.2 76.6,93 v1(80.2,93) 81.8,91.4 v1(81.8,90.6) v1(81.8,88.2) 81.8,87.6 81,86.8 v1(79.8,86.8) Y1.2 ; U5.13 v1(45.85,14.37) ; J12.1 v1(137.7,100.28) ; v1(99.6,45.6) 100.04,46.04 C38.2 ; v1(41.6,99) 41.05,99 U11.5 40.95,97.2 v1(41.6,97.2) ; v1(110.6,99.77) 110.6,100.6 J15.9 109,100.6 v1(109,99.77) ; v1(79.8,67.2) 80.79,67.2 D6.C 80.79,68.4 v1(79.8,68.4) ; v1(110.6,104.97) 110.6,105.9 J15.7 109,105.9 v1(109,105) ; J7.9 v1(93.8,99.6) ; v1(99.4,94.4) 99.5,94.5 D2.1 ; v1(73.8,92.4) 73.56,92.16 C14.2 ; C20.2 v1(92.8,91.4) ; U5.6 v1(28.38,16.82) ; C56.2 v1(51.24,21.96) ; C71.2 v1(28.6,82.1) ; v1(80.8,66.4) 80.9,66.3 D5.2 ; v1(56.8,2.8) 55.4,2.8 J10.M2 v1(52.8,3.4) ; Y2.4 v1(107,92.11) ; v1(102.19,41.5) Q5.2 ; v1(35.88,16.82) U5.3 ; C53.2 v1(53.8,12.8) ; 75.8,91.8 Y1.4 ; C65.2 v1(143.4,93.4) ; v1(103.4,86.2) 104,86.8 Y2.2 ; U5.14 v1(46.37,1.7) ; D1.A v1(17.6,91.8) ; C41.2 v1(70,50.4) ; U5.15 v1(21.63,1.7) ; C29.2 v1(72.2,50) ; v1(39.4,87.8) 39.4,86.45 U11.4 40.8,86.45 v1(40.8,87.8) ; C67.2 v1(159.2,95.6) ; C28.2 v1(68.84,48.89) ; C58.2 v1(55.4,21.96)
  BOTTOM w0.3: J8.48 99.25,45.95 v1(99.6,45.6) ; J8.36 93.25,48.15 v1(93,48.4) ; J8.5 77.75,46.05 v1(78.6,45.2) ; J8.38 v1(94.25,48.4)
  BOTTOM w0.8: J9.M2 v1(125.57,45) ; v1(118.5,42.4) J9.M1
  vias: v1(6.8,88.2) v1(6.8,87) v1(6.8,85.8) v1(65.4,89.4) v1(68,91) v1(68.6,89.4) v1(84.8,50.4) v2(67,89.4)
VBUS_OTG: length 13.3
  TOP w0.5: J7.1 99.6,99.2 100.2,98.6 C18.1 R11.1
  TOP w0.8: D3.4 v1(90.25,95.45)
  BOTTOM w0.6: v1(90.25,95.45) 96.15,95.45 v1(97.2,94.4)
VCC_3V3_1: length 8.1
  TOP w0.2: R20.1 v1(39.6,21.51) R21.1 ; R19.1 v1(26.71,21.51) ; R22.1 v1(44.18,21.51) ; R18.1 v1(24.2,22.4) ; R17.1 v1(23,22.4)
  TOP w0.4: C22.1 33.38,20.47 v1(33.38,19.6)
  TOP w0.6: U5.4 v1(33.38,19.6)
  vias: v1(46.6,29.4) v1(46.6,28.2) v1(47.8,29.4) v1(47.8,28.2) v1(50.6,20) v1(50.6,18.8)
VCC_3V3_2: length 9.8
  TOP w0.6: C43.1 98.36,37.36 98,37 98,31.4 99,30.4 J3.51
VCC_3V3_3: length 10.2
  TOP w0.3: v1(106.8,54.75) U4.37 102.86,54.75 C23.1 ; C24.1 127.24,54.75 U4.12
  TOP w0.4: C24.1 v1(127.29,55.6) ; v1(126.8,49.6) R23.2 R24.2 ; R25.2 v1(128.31,56.42)
VCC_3V3_4: length 39.7
  TOP w0.3: U2.15 63.3,88.9 63,88.6 C7.1 ; U2.23 67,85.8 66.6,85.4 C8.1 ; U2.36 70.4,91.4 70.8,91.8 v1(70.8,92.31) ; v1(66.8,94) 67,93.8 U2.5 ; U2.29 71.7,87.9 v1(72,87.6) ; U2.10 C6.1
  TOP w0.4: C6.1 62.11,90.91 61.8,90.6 60,90.6 59.2,89.8 59.2,88.4 59.8,87.8 61.92,87.8 61.96,87.76 ; v1(115.67,88.72) U12.4 119.37,88.72 C77.1 ; v1(72,87.6) 72.51,87.09 C9.1 72.51,86.11 71.8,85.4 R6.1 ; R9.1 65.69,83.89 65.8,84 v1(65.8,84.6) 66,84.8 66.49,84.8 C8.1
  TOP w0.6: v1(70.8,92.31) 70.8,92.8 71.4,93.4 C10.1 ; C7.1 62.11,87.91 61.96,87.76 C4.1 61.96,86.24 v1(63.6,84.6) 64.31,83.89 R9.1 ; R7.1 v1(69.4,83.89) ; v1(66.8,94) 66.4,94.4 C5.1 ; R15.1 v1(89.09,96.62)
  BOTTOM w0.8: 115.67,88.67 v1(115.67,88.72)
  vias: v1(93,79) v1(94.2,79) v1(95.4,79) v1(111.6,79) v1(112.8,79) v1(114,79)
BAT: length 3.4
  TOP w0.8: J4.5 v1(53,75) ; J4.7 v1(55,75)
  vias: v1(45.4,77.2) v1(46.6,77.2)
CSI_AVDD: length 18.9
  TOP w0.3: C54.1 67.4,7.2 67.05,6.85 J10.4 v1(67.05,4.05)
  BOTTOM w0.6: v1(67.05,4.05) 62.7,8.4 56,8.4 54.8,7.2 v1(54.8,6.6)
CSI_D0: length 34.4
  TOP w0.2: v1(65.4,19.2) 66.2,20 66.2,30.6 67,31.4 67,33.28 ; v1(57.8,15) 57.8,14.8 58.4,14.2 58.4,10.4 59.55,9.25 J10.19
  BOTTOM w0.2: v1(65.4,19.2) 62.2,16 59.2,16 58.2,15 v1(57.8,15)
CSI_D1: length 30.6
  TOP w0.2: v1(65.4,18) 66.6,19.2 66.6,22.4 67,22.8 J3.19 ; v1(57.2,13.8) 56.8,13.4 56.8,10.8 58.55,9.05 J10.21
  BOTTOM w0.2: v1(57.2,13.8) 57.45,14.05 57.85,14.05 59.4,15.6 62.6,15.6 65,18 v1(65.4,18)
CSI_D2: length 35.8
  TOP w0.2: v1(66.6,18.2) 67,18.6 67,22.2 68,23.2 68,30.4 69,31.4 69,33.28 ; J10.22 58.05,8.35 v1(56.8,9.6)
  BOTTOM w0.2: v1(56.8,9.6) 56.9,9.7 56.9,11.31 56.9,11.31 56.9,11.89 56.9,11.89 56.9,12.5 59.6,15.2 62.74,15.2 64.54,17 65.4,17 v1(66.6,18.2)
CSI_D3: length 31.4
  TOP w0.2: J3.21 69,23.6 67.4,22 67.4,17.6 v1(67,17.2) ; v1(57.6,11.6) 57.6,10.6 59.05,9.15 J10.20
  BOTTOM w0.2: v1(67,17.2) 66.4,17.2 65.8,16.6 64.67,16.6 62.87,14.8 59.86,14.8 57.6,12.54 v1(57.6,11.6)
CSI_D4: length 36.5
  TOP w0.2: v1(66.4,16.2) 66.42,16.2 66.61,16.4 67.2,16.4 67.8,17 67.8,21.8 69.8,23.8 69.8,30.4 71,31.6 71,33.28 ; J10.18 60.05,9.75 v1(59.8,10)
  BOTTOM w0.2: v1(59.8,10) 58.8,11 58.8,13.21 59.99,14.4 63,14.4 64.8,16.2 v1(66.4,16.2)
CSI_D5: length 30.2
  TOP w0.2: J3.23 71,23.8 68.6,21.4 68.6,16.2 v1(68.2,15.8) ; v1(61.05,13.4) J10.16
  BOTTOM w0.2: v1(68.2,15.8) 66.99,15.8 66.69,15.5 64.7,15.5 63.2,14 61.65,14 v1(61.05,13.4)
CSI_D6: length 35.4
  TOP w0.2: 73,33.28 73,31.6 72,30.6 72,24.2 69,21.2 69,15.6 68.4,15 v1(67.4,15) ; v1(61.8,12.8) 61.6,12.6 61.6,7 62.05,6.55 J10.14
  BOTTOM w0.2: v1(61.8,12.8) 62.6,13.6 63.4,13.6 64.8,15 v1(67.4,15)
CSI_D7: length 30
  TOP w0.2: v1(68.2,14.2) 69.4,15.4 69.4,21 73,24.6 J3.25 ; J10.12 63.05,6.75 62.4,7.4 62.4,11.4 63.4,12.4 v1(63.4,12.8)
  BOTTOM w0.2: v1(63.4,12.8) 64.8,14.2 v1(68.2,14.2)
CSI_DVDD: length 13.6
  TOP w0.2: C57.1 64.2,7.15 64.05,7 J10.10
  TOP w0.3: v1(64.4,4) 64.05,4.35 J10.10
  BOTTOM w0.6: v1(56.8,7.4) 62.2,7.4 64.4,5.2 v1(64.4,4)
CSI_HSYNC: length 28.9
  TOP w0.2: 65,33.28 65,31.4 64,30.4 64,13.4 64.2,13.2 64.2,12.78 64.78,12.2 64.78,10.03 65,9.8 65,7.4 64.55,6.95 J10.9
CSI_IOVDD: length 35
  TOP w0.2: J10.11 63.55,6.85 63.2,7.2 C52.1
  TOP w0.3: J10.11 63.55,4.55 v1(63,4)
  TOP w0.6: R67.1 R66.1 v1(69.4,7.6)
  BOTTOM w0.6: v1(52,7.8) 54.4,5.4 55.4,5.4 56.2,6.2 61.8,6.2 63,5 v1(63,4) 63,3.4 63.8,2.6 68.6,2.6 69.4,3.4 v1(69.4,7.6)
CSI_MCLK: length 24
  TOP w0.2: J10.13 62.55,6.65 62,7.2 62,11.6 62.6,12.2 62.6,13.2 63,13.6 J3.15
CSI_PCLK: length 29.2
  TOP w0.2: J10.17 60.55,12.6 60.2,12.95 60.2,13.8 62,15.6 62,30.6 63,31.6 63,33.28
CSI_PWR_EN: length 28.8
  TOP w0.2: U8.3 50.05,10.95 50.6,10.4 52.2,10.4 52.8,11 52.8,12.8 53.4,13.4 v1(53.4,15.6) 52.55,16.45 U9.3 ; 51,33.28 v1(51,31.6)
  BOTTOM w0.2: v1(53.4,15.6) 53.4,28.2 51.8,29.8 51.8,30.8 v1(51,31.6)
CSI_RST: length 61.4
  TOP w0.2: 66.2,13.8 67.09,12.91 R67.2 ; 66.2,13.8 66.2,14.8 68.2,16.8 68.2,21.6 70.2,23.6 70.2,30.2 71.8,31.8 71.8,34.8 71.2,35.4 52.6,35.4 52,34.8 52,31.4 51,30.4 J3.3 ; 66.2,13.8 66.2,12.7 65.9,12.4 65.9,10.8 66.2,10.5 66.2,6.75 66.05,6.6 J10.6
CSI_VSYNC: length 24.3
  TOP w0.2: J10.7 65.55,6.75 65.8,7 65.8,10.32 65.53,10.6 65.53,12.6 65.8,12.88 65.8,13.6 64.6,14.8 64.6,19.6 65,20 J3.17
DITHB: length 3.8
  TOP w0.2: v1(99,48.4) 99.6,49 R62.1 R56.2
  BOTTOM w0.2: v1(99,48.4) 98.75,48.15 J8.47
H_DM1: length 14
  TOP w0.2: J5.2 80,96.8 79.2,96 79.2,95.43 78.29,94.52 69.92,94.52 69,93.6 U2.1
H_DM2: length 14.7
  TOP w0.2: J6.2 57.4,96.29 57.4,95.8 57.6,95.6 67,95.6 68,94.6 U2.3
H_DM3: length 37.8
  TOP w0.2: U11.2 35.15,85.75 35.6,86.2 35.6,87.93 36.87,89.2 43.2,89.2 47.6,93.6 66,93.6 66.5,93.1 U2.6
H_DP1: length 14.1
  TOP w0.2: J5.3 78,96.8 78.8,96 78.8,95.6 78.12,94.92 69.72,94.92 68.5,93.7 U2.2
H_DP2: length 14.9
  TOP w0.2: J6.3 57,95.89 57,95.6 57.4,95.2 66.8,95.2 67.5,94.5 U2.4
H_DP3: length 38
  TOP w0.2: U2.7 66,93 65.8,93.2 47.81,93.2 43.41,88.8 37.2,88.8 36,87.6 36,86 35.4,85.4 35.4,85.2 35.6,85 36,85 36.4,85.4 36.95,85.4 U11.3
HPCOM: length 65.9
  TOP w0.2: R68.1 125.49,96.31 126.4,95.4 126.4,88.4 122,84 98.8,84 97.2,85.6 86.8,85.6 84.2,83 84.2,79.8 85,79 86.6,79 87,78.6 J4.39
  TOP w0.6: R68.1 124.8,98.9 J11.1
HPOUTL: length 80.3
  TOP w0.2: 132.2,90.2 133.2,91.2 133.2,95.8 132.69,96.31 R70.1 ; 132.2,90.2 142.2,90.2 146,94 C68.1 ; 132.2,90.2 129.4,90.2 122.4,83.2 98.4,83.2 96.8,84.8 88,84.8 87,83.8 J4.40
  TOP w0.6: J11.2 131.8,98.9 R70.1
HPOUTR: length 102
  TOP w0.2: C69.1 147,95.8 142,90.8 137.6,90.8 136.4,92 136.4,95.2 134.2,97.4 134.2,106.2 133.9,106.5 J11.3 129.3,106.5 128.2,105.4 R69.1 127.51,96.31 126.8,95.6 126.8,88.2 122.2,83.6 98.6,83.6 97,85.2 87,85.2 85,83.2 J4.38
IPSOUT: length 364
  TOP w0.6: R5.1 9.8,25.2 18.6,34 36,34 46.8,44.8 v1(56.4,44.8) ; L3.1 162.71,96.31 163.2,96.8 163.2,104.8 159,109 90.8,109 87.6,105.8 69.4,105.8 66.8,103.2 49.2,103.2 45.6,99.6 45.6,94 42.8,91.2 30.6,91.2 27.2,87.8 27.2,81.4 28.8,79.8 41.2,79.8 46.8,85.4 55.2,85.4 56,84.6 56,79.2 57,78.2 J4.9
  TOP w0.8: v1(46.6,6) 18,6 9.8,14.2
  BOTTOM w0.4: v1(46.6,6) 51.2,1.4 86.2,1.4 87.8,3 S2.1
  vias: v1(56.4,47) v1(57,74.8) v1(57,73.6) v1(57.4,45.8) v1(58.4,47) v1(58.4,44.8) v1(58.6,74.8) v1(58.6,73.6)
L/R: length 8.4
  TOP w0.2: v1(94.6,45.2) 91.6,48.2 R60.1 R54.2
  BOTTOM w0.2: v1(94.6,45.2) 94.75,45.35 J8.39
LCD_AVDD: length 2
  BOTTOM w0.3: 96.75,45.85 J8.43
  BOTTOM w0.5: v1(96.75,45) 96.75,45.85
  vias: v1(79.6,54) v1(80.2,55.2) v1(82.6,49.8) v1(83.6,50.2)
LCD_BL_EN: length 21.1
  TOP w0.2: v1(76.4,38.2) 76,38.2 75,37.2 R26.1 75,37.16 J3.28 ; v1(77.8,44.2) 77.8,45.8 77.2,46.4 75.2,46.4 74.6,45.8 72.2,45.8 71.75,45.35 U6.4
  BOTTOM w0.2: v1(76.4,38.2) 76.4,40 77.2,40.8 77.2,43.6 v1(77.8,44.2)
LCD_CLK: length 24.5
  TOP w0.2: J3.32 79,36.4 v1(80,37.4)
  BOTTOM w0.2: J8.37 93.75,43.15 88.4,37.8 80.4,37.8 v1(80,37.4)
LCD_D2: length 22.6
  TOP w0.2: J3.50 97,38.6 89.8,45.8 v1(84.4,45.8)
  BOTTOM w0.2: v1(84.4,45.8) 84,45.8 83.75,46.05 J8.17
LCD_D3: length 27.9
  TOP w0.2: J3.49 97,30.6 96,31.6 96,39 89.6,45.4 85.8,45.4 85.4,45 v1(83.8,45)
  BOTTOM w0.2: J8.16 83.25,45.55 v1(83.8,45)
LCD_D4: length 23.6
  TOP w0.2: J3.48 95,39.4 89.4,45 86,45 85.2,44.2 83.2,44.2 v1(82.8,44.6)
  BOTTOM w0.2: v1(82.8,44.6) 82.75,44.65 J8.15
LCD_D5: length 29.1
  TOP w0.2: J3.47 95,30.8 94,31.8 94,39.8 89.2,44.6 86.2,44.6 85.4,43.8 82.4,43.8 v1(81.8,44.4)
  BOTTOM w0.2: J8.14 82.25,45.6 81.75,45.1 81.75,44.45 v1(81.8,44.4)
LCD_D6: length 24.6
  TOP w0.2: v1(81.4,43.4) 85.6,43.4 86.4,44.2 89,44.2 93,40.2 J3.46
  BOTTOM w0.2: J8.13 81.75,45.75 81,45 81,43.8 v1(81.4,43.4)
LCD_D7: length 30.1
  TOP w0.2: J3.45 93,30.6 92,31.6 92,40.6 88.8,43.8 86.6,43.8 85.8,43 82.2,43 v1(81.6,42.4)
  BOTTOM w0.2: J8.12 81.25,45.85 80.6,45.2 80.6,43 81.2,42.4 v1(81.6,42.4)
LCD_D10: length 15.1
  TOP w0.2: J3.44 91,40.4 v1(88.4,43)
  BOTTOM w0.2: v1(88.4,43) 88.4,44.4 87.75,45.05 J8.25
LCD_D11: length 19.8
  TOP w0.2: J3.43 91,30.8 90,31.8 90,39.8 v1(87.6,42.2)
  BOTTOM w0.2: J8.24 87.25,44.55 87.6,44.2 v1(87.6,42.2)
LCD_D12: length 14.6
  TOP w0.2: J3.42 89,39.8 86.8,42 v1(86.8,43)
  BOTTOM w0.2: J8.23 86.75,43.85 86.8,43.8 v1(86.8,43)
LCD_D13: length 20
  TOP w0.2: v1(86,42.2) 86,42 88.4,39.6 88.4,36.6 88,36.2 88,31.6 89,30.6 J3.41
  BOTTOM w0.2: v1(86,42.2) 86,44.15 86.25,44.4 J8.22
LCD_D14: length 15.7
  TOP w0.2: J3.40 87,36.2 87.8,37 87.8,39.2 v1(84.8,42.2)
  BOTTOM w0.2: v1(84.8,42.2) 84.8,43.65 85.75,44.6 J8.21
LCD_D15: length 21.2
  TOP w0.2: J3.39 87,30.6 86,31.6 86,36.2 87,37.2 87,38.8 v1(83.6,42.2)
  BOTTOM w0.2: v1(83.6,42.2) 83.6,43.2 85.25,44.85 J8.20
LCD_D18: length 17.9
  TOP w0.2: J3.38 85,36.2 86,37.2 v1(86,38.8)
  BOTTOM w0.2: v1(86,38.8) 86.4,39.2 88.8,39.2 91.75,42.15 J8.33
LCD_D19: length 23.3
  TOP w0.2: J3.37 85,30.6 84,31.6 84,36.2 85,37.2 v1(85,38.8)
  BOTTOM w0.2: J8.32 91.25,42.25 88.6,39.6 85.8,39.6 v1(85,38.8)
LCD_D20: length 18.8
  TOP w0.2: v1(84,38.8) 84,37.2 83,36.2 J3.36
  BOTTOM w0.2: J8.31 90.75,42.35 88.4,40 85.2,40 v1(84,38.8)
LCD_D21: length 24.2
  TOP w0.2: J3.35 83,30.6 82,31.6 82,36.2 83,37.2 v1(83,38.8)
  BOTTOM w0.2: v1(83,38.8) 84.6,40.4 88.2,40.4 90.25,42.45 J8.30
LCD_D22: length 19.7
  TOP w0.2: v1(82,38.8) 82,37.2 81,36.2 J3.34
  BOTTOM w0.2: J8.29 89.75,42.55 88,40.8 84,40.8 v1(82,38.8)
LCD_D23: length 25.1
  TOP w0.2: v1(81,38.8) 81,37.2 80,36.2 80,31.6 81,30.6 J3.33
  BOTTOM w0.2: v1(81,38.8) 83.4,41.2 87.8,41.2 89.25,42.65 J8.28
LCD_DE: length 20.4
  TOP w0.2: J3.31 79,30.6 78,31.6 78,36.4 80.2,38.6 80.2,40.3 79,41.5 v1(79,41.6)
  BOTTOM w0.2: J8.9 79.75,46.15 79.4,45.8 79.4,42 v1(79,41.6)
LCD_HSYNC: length 15.3
  TOP w0.2: v1(79.4,39) 79.4,38.41 77,36.01 J3.30
  BOTTOM w0.2: J8.11 80.75,45.95 80.2,45.4 80.2,40.8 79.4,40 v1(79.4,39)
LCD_PWR: length 65.5
  TOP w0.2: J3.27 75,30.8 74.2,31.6 v1(74.2,35.6) 73.6,36.2 60,36.2 57.6,38.6 v1(57.6,42)
  TOP w0.4: R49.1 v1(59.4,51.2)
  TOP w0.6: R48.1 v1(98.29,38.89)
  BOTTOM w0.2: v1(59.4,51.2) 59.4,43.8 v1(57.6,42) ; v1(98.29,38.89) 95,35.6 v1(74.2,35.6)
LCD_RST: length 6.6
  TOP w0.2: C49.1 R53.2 97.6,45.8 v1(97.8,45.6)
  BOTTOM w0.2: J8.44 97.25,46.15 v1(97.8,45.6)
LCD_VCC: length 2.6
  TOP w0.2: 78.8,48.5 v1(78.75,48.55)
  TOP w0.4: C39.1 78.8,48.5
  BOTTOM w0.3: J8.7 v1(78.75,48.55)
LCD_VSYNC: length 20.3
  TOP w0.2: J3.29 77,31 76.2,31.8 76.2,36.2 78.4,38.4 v1(78.4,38.6)
  BOTTOM w0.2: J8.10 80.25,46.05 79.8,45.6 79.8,41 78.4,39.6 v1(78.4,38.6)
LRADC: length 130.3
  TOP w0.2: v1(94,67.8) 101,67.8 118.6,50.2 118.6,45.6 120.6,43.6 120.6,37.8 119.8,37 v1(119.8,26.6) ; J4.35 83,75.2 83.6,74.6 v1(84,74.6) ; R85.1 R84.2 C80.1 107.31,11.91 108.4,13 133.6,13 135.4,14.8 135.4,21.2 130.6,26 v1(124.2,26)
  BOTTOM w0.2: v1(84,74.6) 87.2,74.6 v1(94,67.8) ; v1(124.2,26) 122.8,26 121.4,27.4 120.6,27.4 v1(119.8,26.6)
MICIN1: length 105.1
  TOP w0.2: C62.1 142,92.14 141.26,91.4 138,91.4 137,92.4 137,95.4 134.8,97.6 134.8,106.6 133.8,107.6 129.2,107.6 126,104.4 124.2,104.4 122.6,102.8 122.6,91 123.4,90.2 123.4,86.2 121.8,84.6 99.4,84.6 97.6,86.4 86.6,86.4 83.8,83.6 83.8,79.6 85,78.4 J4.37
MODE: length 4.3
  TOP w0.3: v1(79.8,48.6) 80.11,48.91 R57.2 81.11,49.8 R63.1
  BOTTOM w0.2: J8.8 79.25,47.85 79.8,48.4 v1(79.8,48.6)
N_VBUSEN: length 51
  TOP w0.2: R16.2 86.4,87.8 82.6,84 78.6,84 78,83.4 78,75.2 77,74.2 71.8,74.2 v1(71.2,74.8)
  TOP w0.6: v1(65,79.6) J4.18
  BOTTOM w0.2: v1(71.2,74.8) 70.2,73.8 68.6,73.8 67.8,74.6 67.8,78.6 67.4,79 65.6,79 v1(65,79.6)
NALE/SPI0_MISO: length 81.7
  TOP w0.2: J4.43 91,75 91.4,74.6 93,74.6 94.2,73.4 106.2,73.4 121.8,57.8 v1(122.4,57.8) 122.95,57.25 U4.17
  BOTTOM w0.2: J16.13 155.59,63.76 151.03,59.2 123.8,59.2 v1(122.4,57.8)
NCE0: length 76.1
  TOP w0.2: R91.2 128.31,51.29 129.6,50 129.6,46.2 125,41.6 v1(125,39) 125,36.2 126,35.2 126,32.2 125,31.2 125,28.71
  BOTTOM w0.2: v1(125,39) 125.4,38.6 140.2,38.6 154.4,52.8 154.4,56.6 157.8,60 160.32,60 J16.16
NCE1/SPI0_CS0: length 81.4
  TOP w0.2: v1(118.8,59.2) 118.8,59.6 105.8,72.6 93.8,72.6 92.6,73.8 90.2,73.8 89,75 J4.41
  BOTTOM w0.2: v1(118.8,59.2) 119.6,60 150.7,60 157,66.3 J16.11
NCLE/SPI0_CLK: length 91
  TOP w0.2: J4.42 89,79.2 90,78.2 90,75 90.8,74.2 92.8,74.2 94,73 106,73 v1(122.25,56.75) U4.16
  BOTTOM w0.2: v1(122.25,56.75) 122.35,56.75 124.4,58.8 151.2,58.8 154.8,62.4 160.18,62.4 J16.14
NDQ0/SDC2_D0: length 80.4
  TOP w0.2: v1(117,31.6) J3.70 117,48.2 106.45,58.75 U4.29
  BOTTOM w0.2: J16.29 152.84,43.44 142.8,33.4 117.8,33.4 117,32.6 v1(117,31.6)
NDQ1/SDC2_D1: length 88.6
  TOP w0.2: U4.30 106.35,58.25 116,48.6 116,31.4 v1(117,30.4) 117,28.71
  BOTTOM w0.2: v1(117,30.4) 116.2,31.2 116.2,32.4 117.6,33.8 142.6,33.8 153.4,44.6 160.16,44.6 J16.28
NDQ2/SDC2_D2: length 81.4
  TOP w0.2: v1(115,31.6) J3.68 115,43.2 115.4,43.6 115.4,48.6 106.25,57.75 U4.31
  BOTTOM w0.2: v1(115,31.6) 115,31.8 117.4,34.2 142.4,34.2 154.2,46 158.98,46 J16.27
NDQ3/SDC2_D3: length 90.1
  TOP w0.2: U4.32 106.15,57.25 114.6,48.8 114.6,44 114,43.4 114,31.4 v1(115,30.4) 115,28.71
  BOTTOM w0.2: v1(115,30.4) 114.2,31.2 114.2,32.2 116.6,34.6 142.2,34.6 154.8,47.2 160.22,47.2 J16.26
NDQ4/SDC2_D4: length 84.8
  TOP w0.2: U4.41 107.65,52.75 108.6,51.8 110.2,51.8 113.6,48.4 113.6,48 113.37,47.77 113,47.77 112.8,47.57 112.8,47.17 113,46.97 113.8,46.97 114,46.77 114,46.37 113.8,46.17 113,46.17 112.8,45.97 112.8,45.57 113,45.37 113.8,45.37 114,45.17 114,44.77 113.8,44.57 113,44.57 112.61,44.19 112.61,35.98 113,35.6 J3.66 v1(113,31.6)
  BOTTOM w0.2: J16.25 155.52,48.52 142,35 116.4,35 v1(113,31.6)
NDQ5/SDC2_D5: length 91.5
  TOP w0.2: 113,28.71 v1(113,30.4) 112,31.4 112,47.2 111.2,48 108.62,48 108.42,48.2 108.42,48.62 108.6,48.8 109.2,48.8 109.4,49 109.4,49.4 109.2,49.6 108.6,49.6 108.4,49.8 108.4,50.2 108.6,50.4 109,50.4 109.2,50.6 109.2,51 109,51.2 108.4,51.2 107.35,52.25 U4.42
  BOTTOM w0.2: J16.24 160.28,49.8 156.2,49.8 141.8,35.4 115.8,35.4 112.2,31.8 112.2,31.2 v1(113,30.4)
NDQ6/SDC2_D6: length 87.7
  TOP w0.2: U4.43 107.05,51.75 107.8,51 107.8,47.4 108,47.2 111,47.2 111.2,47 111.2,46.6 111,46.4 108,46.4 107.8,46.2 107.8,45.8 108,45.6 110.6,45.6 111,45.2 J3.64 v1(111,31.6)
  BOTTOM w0.2: v1(111,31.6) 115.2,35.8 141.6,35.8 156.86,51.06 J16.23
NDQ7/SDC2_D7: length 92.8
  TOP w0.2: 111,28.71 v1(111,30.4) 110,31.4 110,39.64 109.8,39.84 109.4,39.84 109.2,40.04 109.2,40.44 109.4,40.64 109.8,40.64 110,40.84 110,41.24 109.8,41.44 109.4,41.44 109.2,41.64 109.2,42.04 109.4,42.24 109.8,42.24 110,42.44 110,42.84 109.8,43.04 109.4,43.04 109.2,43.24 109.2,43.64 109.4,43.84 109.8,43.84 110,44.04 110,44.6 109.8,44.8 107.6,44.8 107.2,45.2 107.2,50.8 106.75,51.25 U4.44
  BOTTOM w0.2: J16.22 160.34,52.4 157.6,52.4 141.4,36.2 114.6,36.2 110.2,31.8 110.2,31.2 v1(111,30.4)
NDQS: length 61.1
  TOP w0.2: J3.62 v1(109,31.6)
  BOTTOM w0.2: v1(109,31.6) 114,36.6 141.2,36.6 156.8,52.2 156.8,52.8 157.6,53.6 J16.21
NRB0/SDC2_CMD: length 74
  TOP w0.2: v1(119.4,39.4) 119,39 J3.72 v1(119,31.6) ; v1(123.6,42) 124.2,42 128.8,46.6 128.8,47.4 ; 128.8,47.4 128.8,49.6 126.15,52.25 U4.7 ; 128.8,47.4 128.51,47.69 R24.1
  BOTTOM w0.2: J16.31 151.5,40.9 143.2,32.6 119.4,32.6 119,32.2 v1(119,31.6) ; v1(119.4,39.4) 121,39.4 v1(123.6,42)
NRB1/SDC2_CLK: length 51.7
  TOP w0.2: 119,28.71 v1(119,30.4)
  BOTTOM w0.2: v1(119,30.4) 118.2,31.2 118.2,32 119.2,33 143,33 152.2,42.2 160.3,42.2 J16.30
NRE: length 71.7
  TOP w0.2: J3.78 125,35.2 124.2,36 v1(124.2,39.8) 124.2,41.4 129.2,46.4 129.2,49.8 126.25,52.75 U4.8
  BOTTOM w0.2: J16.15 157.82,61.22 154,57.4 154,53 140,39 126,39 125.2,39.8 v1(124.2,39.8)
NWE/SPI0_MOSI: length 88.4
  TOP w0.2: J4.44 91,79.2 92,78.2 92,75.4 92.4,75 93.2,75 94.4,73.8 106.4,73.8 121.4,58.8 v1(122.4,58.8) 123.45,57.75 U4.18
  BOTTOM w0.2: v1(122.4,58.8) 123.2,59.6 150.86,59.6 156.26,65 160.24,65 J16.12
PB2/PWM: length 65
  TOP w0.2: TP2.1 R32.1 76.51,40.29 77.4,39.4 77.4,38 75.8,36.4 v1(75.8,31.2) ; 123,28.71 123,26.8 121.6,25.4 v1(81.6,25.4)
  BOTTOM w0.2: v1(75.8,31.2) v1(81.6,25.4)
PB3/IR_TX: length 46.6
  TOP w0.2: 121,28.71 v1(121,30.4)
  BOTTOM w0.2: v1(121,30.4) 122.8,32.2 143.4,32.2 151,39.8 160.44,39.8 J16.32
PB4/IR_RX: length 48.6
  TOP w0.2: J3.74 v1(121,31.51)
  BOTTOM w0.2: J16.34 161.54,38.34 160.2,37 149.4,37 143.8,31.4 127.6,31.4 125.8,29.6 120.8,29.6 120.2,30.2 120.2,30.71 v1(121,31.51)
PB10: length 122.1
  TOP w0.2: J3.76 v1(123,31.4) 122,30.4 122,26.4 121.4,25.8 119.4,25.8 119,26.2 75.2,26.2 69.8,20.8 69.8,14.8 v1(69.4,14.4) R66.2 ; v1(65,13.2) 65,12.51 65.15,12.36 65.15,10.25 65.4,10 65.4,7.2 65.05,6.85 J10.8
  BOTTOM w0.2: v1(69.4,14.4) 68.2,13.2 v1(65,13.2) ; J16.33 150.16,38.36 143.6,31.8 123.4,31.8 v1(123,31.4)
